# Allegro board LAUNCHXL-CC1310.brd
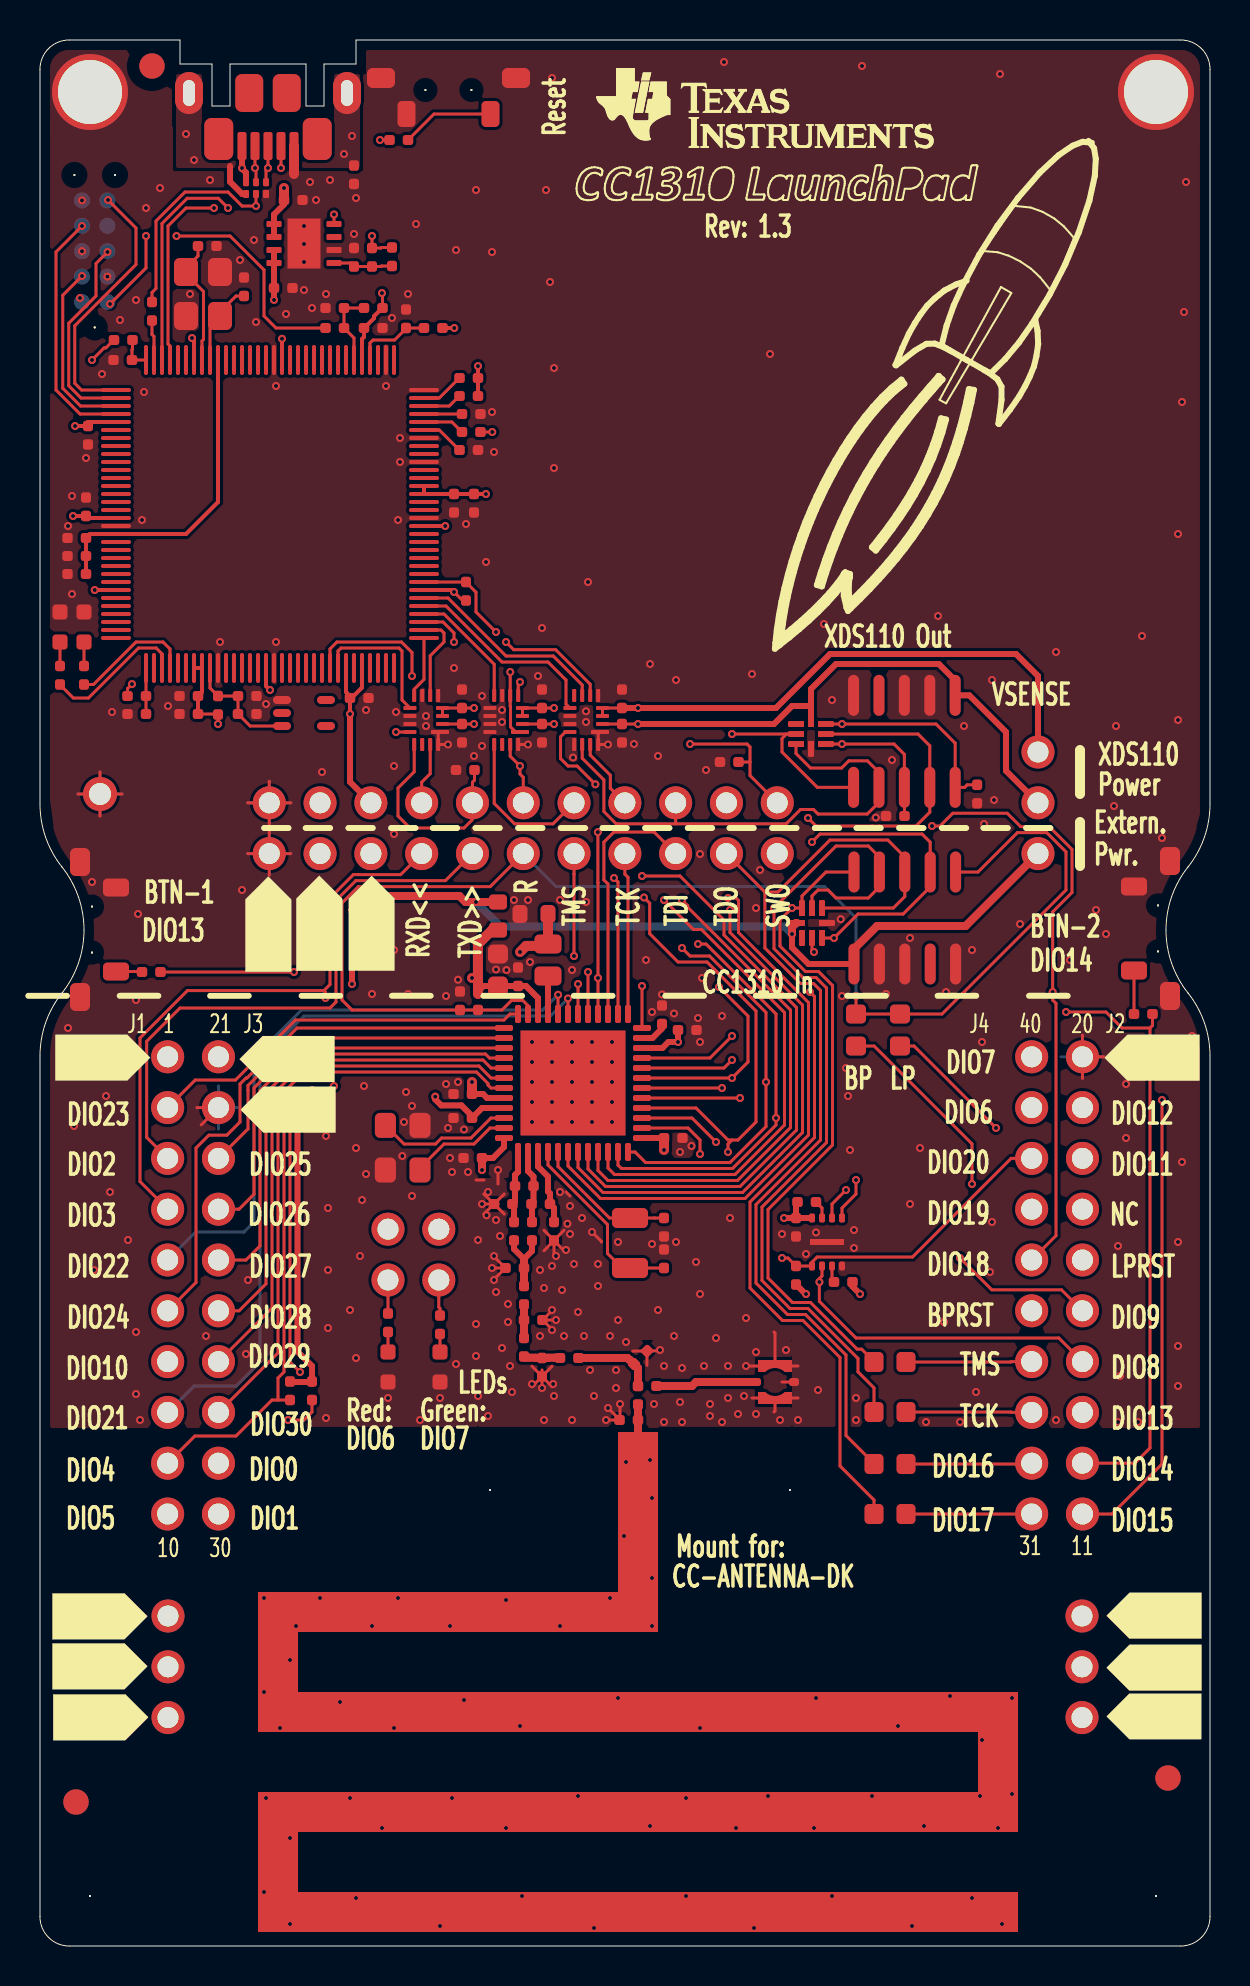
[diagram p0: board, top side]
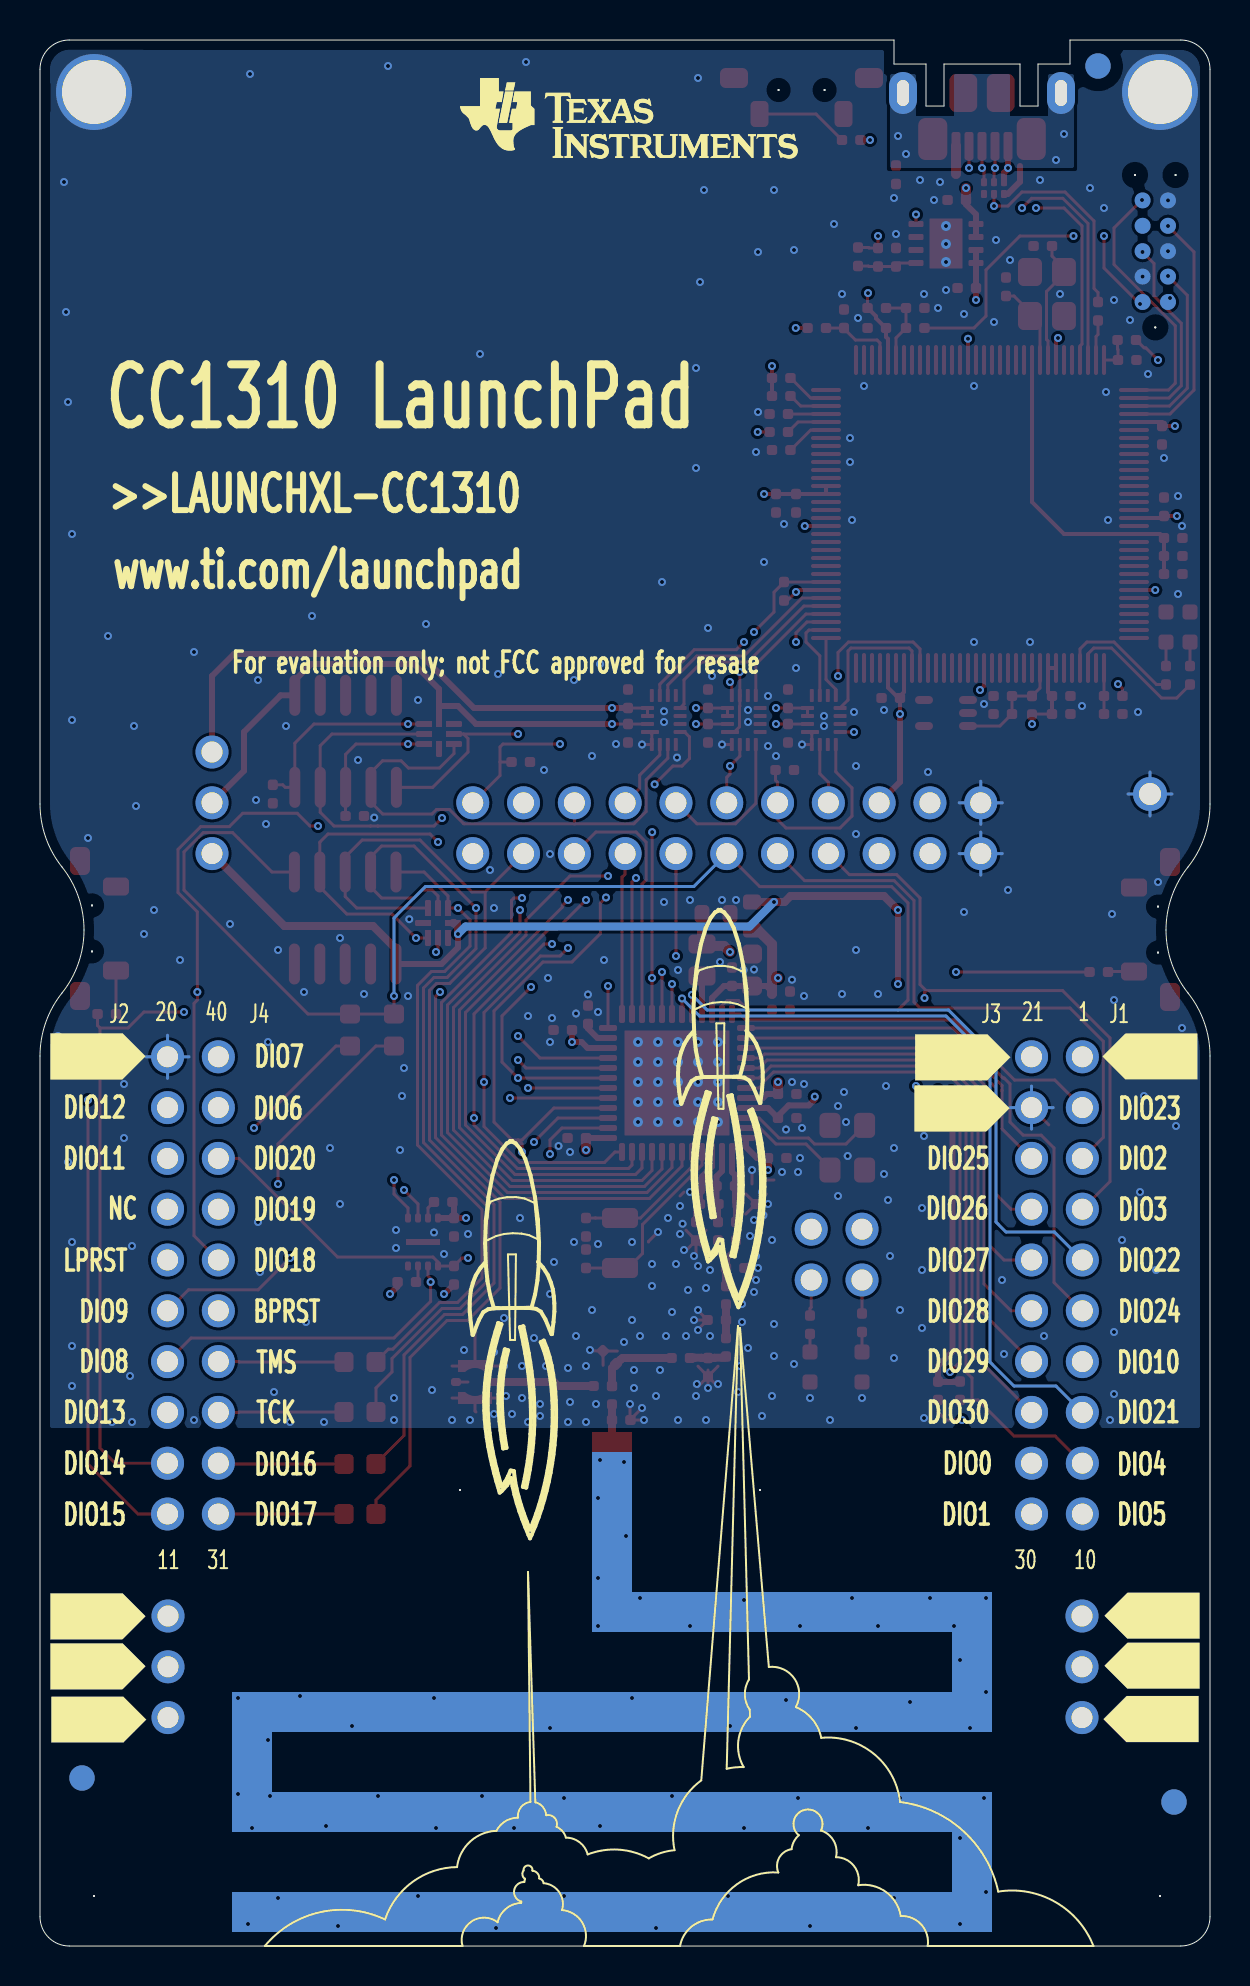
[diagram p1: board, bottom side, seen from below]

Outline 58.5 x 95.3 mm; copper layers: TOP, L2, L3, BOTTOM. Coordinates in mm from the lower left corner of the outline.
Outline path: 0,93.84 0,57.1 arc(0.28,55.43) 1.1,53.95 arc(1.92,52.47) 2.2,50.8 arc(1.92,49.13) 1.1,47.65 arc(0.28,46.17) 0,44.5 0,1.46 arc(0.43,0.43) 1.46,0 57.04,0 arc(58.07,0.43) 58.5,1.46 58.5,44.5 arc(58.22,46.17) 57.4,47.65 arc(56.58,49.13) 56.3,50.8 arc(56.58,52.47) 57.4,53.95 arc(58.22,55.43) 58.5,57.1 58.5,93.84 arc(58.07,94.87) 57.04,95.3 15.8,95.3 15.8,94.1 14.2,94.1 14.2,92 13.3,92 13.3,94.1 9.5,94.1 9.5,92 8.6,92 8.6,94.1 7,94.1 7,95.3 1.46,95.3 arc(0.43,94.87) 0,93.84

## Placement (name value [footprint] x y rotation side)
A1  868MHz/2440MHz  [ANTENNA_DN024N]  29.9 25.2 180 top
C3  100nF  [CAPC1005X60B2N]  31.2 40.4 0 top
C4  100nF  [CAPC1005X60B2N]  31.9 45.8 0 top
C5  100nF  [CAPC1005X60B2N]  21.6 42.6 180 top
C6  22uF  [CAPC1608X100A2N]  22.9 48 90 top
C7  100nF  [CAPC1005X60B2N]  23.9 48 90 top
C8  22uF  [CAPC1608X100A2L]  25.4 51.6 180 top
C9  100nF  [CAPC1005X60B2N]  22.1 39.4 180 top
C11  3.6pF  [CAPC1005X60B2N]  22.7 37.1 0 top
C12  2.7pF  [CAPC1005X60B2N]  24.2 33.9 180 top
C13  6.2pF  [CAPC1005X60B2N]  24.2 31.3 0 top
C14  3pF  [CAPC1005X60B2N]  25.1 29.4 270 top
C15  100pF  [CAPC1005X60B2N]  26 29.4 0 top
C16  100nF  [CAPC1005X60B2N]  21.6 41.4 180 top
C17  12pF  [CAPC1005X60B2N]  31.2 33.9 90 top
C18  12pF  [CAPC1005X60B2N]  31.2 36.4 270 top
C19  1uF  [CAPC1005X60B2N]  31.1 46.1 90 top
C20  100nF  [CAPC1005X60B2N]  21 46.8 90 top
C21  100pF  [CAPC1005X60B2N]  25.7 36.2 270 top
C22  3.6pF  [CAPC1005X60B2N]  24.6 36.2 270 top
C24  DNM  [CAPC1005X60B2N]  29.7 29.1 45 top
C30  100nF  [CAPC1005X60B2N]  37.8 36.4 270 top
C32  100nF  [CAPC1005X60B2N]  9.9 62.5 0 top
C33  12pF  [CAPC1005X60B2N]  10.2 82.5 90 top
C34  12pF  [CAPC1005X60B2N]  7.9 85 0 top
C35  10nF  [CAPC1005X60B2N]  15.5 62.4 0 top
C36  10nF  [CAPC1005X60B2N]  2.3 71.5 90 top
C37  10nF  [CAPC1005X60B2N]  2.4 76 270 top
C38  100nF  [CAPC1005X60B2N]  16.2 80.9 0 top
C39  100nF  [CAPC1005X60B2N]  20.7 72.6 270 top
C40  1uF  [CAPC1005X60B2N]  21.7 72.6 270 top
C41  10nF  [CAPC1005X60B2N]  7.9 62.5 180 top
C42  1uF  [CAPC1005X60B2N]  7.9 61.6 180 top
C43  100nF  [CAPC1005X60B2N]  2.3 70.4 180 top
C44  1uF  [CAPC1005X60B2N]  2.3 69.5 180 top
C45  2.2uF  [CAPC1005X60B2N]  2.3 68.6 180 top
C46  100nF  [CAPC1005X60B2N]  18.3 80.9 90 top
C47  15pF  [CAPC1005X60B2N]  16.6 84.9 270 top
C48  2.2uF  [CAPC1005X60B2N]  12.2 87.3 0 top
C49  2.2uF  [CAPC1005X60B2N]  11.7 82.9 0 top
C50  10nF  [CAPC1005X60B2N]  9.9 61.6 0 top
C52  100nF  [CAPC1005X60B2N]  21.1 61.9 90 top
C53  100nF  [CAPC1005X60B2N]  21.1 61.1 270 top
C54  100nF  [CAPC1005X60B2N]  25.1 61.9 90 top
C55  100nF  [CAPC1005X60B2N]  25.1 61.1 270 top
C56  100nF  [CAPC1005X60B2N]  29.1 61.9 90 top
C57  100nF  [CAPC1005X60B2N]  29.1 61.1 270 top
C58  DNM_0402  [CAPC1005X60B2N]  29.9 26.3 180 top
C59  100nF  [CAPC1005X60B2N]  4.6 79.3 180 top
CR1  LPL296-J2L2-25  [LEDC1707X65L]  20 28.2 90 top
CR2  LS L296-P2Q2-1  [LEDC1708X67L]  17.4 28.2 90 top
CR4  LS L296-P2Q2-1  [LEDC1708X67L]  1 66.7 270 top
CR5  LPL296-J2L2-25  [LEDC1707X65L]  2.2 66.7 270 top
CR6  TPD4E004DRY  [SON50P100X145X60-6N]  10.3 87.6 0 top
CR7  TPD6E004RSER  [QFN50P150X150X60-8N]  37.8 61.1 270 top
CR8  TPD6E004RSER  [QFN50P150X150X60-8N]  38.1 50.4 0 top
FIDU1  FIDU_1.27mm  [FID127X142]  5.6 94 0 top
FIDU2  FIDU_1.27mm  [FID127X142]  1.8 7.2 0 top
FIDU3  FIDU_1.27mm  [FID127X142]  56.4 8.4 0 top
FIDU4  FIDU_1.27mm  [FID127X142]  5.6 94 180 bottom
FIDU5  FIDU_1.27mm  [FID127X142]  1.8 7.2 180 bottom
FIDU6  FIDU_1.27mm  [FID127X142]  56.4 8.4 180 bottom
FL1  BLM18HE152SN1  [FIL_BLM18HE152SN1DL]  22.9 50.8 90 top
J1  SSQ-110-23-L-D  [SAMTEC_SSQ11023LD_A2B]  6.38 44.46 0 bottom
J2  SSQ-110-23-L-D  [SAMTEC_SSQ11023LD_A2B]  49.58 44.46 0 bottom
J6  105164-0001  [MOLEX_1051640001_A2N]  10.1 90 0 top
L1  6.8uH  [INDC2012X150L]  25.4 48.5 90 top
L12  7.5nH  [INDC1005X60B2N]  23.7 36.2 270 top
L13  6.8nH  [INDC1005X60B2N]  24.2 33 270 top
L14  6.8nH  [INDC1005X60B2N]  24.2 30.4 270 top
L22  27nH  [INDC1005X60B2N]  23.75 38 0 top
L23  7.5nH  [INDC1005X60B2N]  25.5 37.1 180 top
MH1  HOLE_3.2mm_NPL  [MTG320]  2.5 2.5 0 top
MH2  HOLE_3.2mm_NPL  [MTG320]  55.8 2.5 0 top
MH3  HOLE_3.2mm_PTH  [MTG320_380]  2.5 92.7 0 top
MH4  HOLE_3.2mm_PTH  [MTG320_380]  55.8 92.7 0 top
MH5  HOLE_1.1mm_PTH  [MTG110_170]  3 57.6 0 top
NOREF  #VALUE  [unnamed]  22.5 22.8 0 top
NOREF#2  -  [#2]  -1.8 8.9 0 top
NOREF#3  -  [#2]  16.5 46.3 90 top
NOREF#4  -  [#2]  40.01 0 90 top
NOREF#5  -  [#2]  53.1 10.1 0 top
NOREF#6  -  [#2]  0.7 43.2 0 top
NOREF#7  -  [#2]  51.6 14.1 0 top
NOREF#8  -  [#2]  13.8 46.4 90 top
NOREF#9  -  [#2]  8.3 39.4 0 top
NOREF#10  -  [#2]  51.5 42 0 top
NOREF#11  -  [#2]  17.8 48.7 90 top
NOREF#12  -  [#2]  -1.7 11.6 0 top
NOREF#13  -  [#2]  0 79.15 0 top
NOREF#14  -  [#2]  -1.7 14.1 0 top
NOREF#15  -  [#2]  51.6 11.5 0 top
NOREF#16  -  [#2]  8.3 41.8 0 top
NOREF#17  -  [#2]  60.3 42.1 180 bottom
NOREF#18  -  [#2]  17.2 41.9 180 bottom
NOREF#19  -  [#2]  7 8.8 180 bottom
NOREF#20  -  [#2]  17.1 39.5 180 bottom
NOREF#21  -  [#2]  58 10.1 180 bottom
NOREF#22  -  [#2]  60.3 11.6 180 bottom
NOREF#23  -  [#2]  7 11.6 180 bottom
NOREF#24  -  [#2]  51.53 65.52 180 bottom
NOREF#25  -  [#2]  5.6 43.1 180 bottom
NOREF#26  -  [#2]  60.3 14.1 180 bottom
NOREF#27  -  [#2]  7 14.1 180 bottom
P1  BB02-HC031-KB1-603000  [GRADCONN_BB02HC031KB1603000_A2B]  52.1 11.42 90 top
P2  BB02-HC031-KB1-603000  [GRADCONN_BB02HC031KB1603000_A2B]  6.4 11.42 90 top
P4  BB02-HJ221-KB1-603000  [GRADCONN_BB02HJ221KB160300_A2B]  36.86 57.16 180 top
P5  FTSH-105-01-F-DV-K  [SAMTEC_FTSH-105-01-F-DV-K-10L]  40.7 49.1 0 top
P6  BB02-HJ041-KB1-603000  [GRADCONN_BB02HJ041KB1603000_A2B]  17.4 33.3 0 top
P7  FTSH-105-01-F-DV-K  [SAMTEC_FTSH-105-01-F-DV-K-10L]  45.76 62.53 180 top
P8  TC2050-IDC-NL  [TAGCONNECT_TC2050IDCNLN]  2.1 82.2 90 bottom
P10  BB02-HC031-KB1-603000  [GRADCONN_BB02HC031KB1603000_A2B]  49.9 59.7 270 top
P11  MM5829-2700  [MURATA_MM58292700RJ4_A2N]  35.8 28.2 0 top
R1  100k  [RESC1005X40B2N]  21.9 46.8 90 top
R2  3.3k  [RESC1005X40B2N]  12.5 27.3 90 top
R3  3.3k  [RESC1005X40B2N]  13.6 27.3 90 top
R11  2.2k  [RESC1005X40B2N]  37.8 34 270 top
R12  1.8pF  [CAPC1005X60B2N]  29.9 28 270 top
R13  0  [RESC1005X40B2N]  29.9 28 0 top
R14  220  [RESC1005X40B2N]  17.4 30.7 90 top
R15  180  [RESC1005X40B2N]  20 30.6 90 top
R17  10k  [RESC1005X40B2N]  16.2 81.9 0 top
R18  4.7k  [RESC1005X40B2N]  8.9 62.5 270 top
R19  DNM  [RESC1005X40B2N]  5.6 82.2 270 top
R20  100  [RESC1005X40B2N]  15.2 80.9 180 top
R21  DNM  [RESC1005X40B2N]  15.2 81.9 180 top
R22  330k  [RESC1005X40B2N]  5.3 62.5 180 top
R23  180  [RESC1005X40B2N]  1 64 270 top
R24  220k  [RESC1005X40B2N]  5.3 61.6 180 top
R25  220  [RESC1005X40B2N]  2.2 64 270 top
R27  1k  [RESC1005X40B2N]  21.9 77.5 180 top
R28  4.87k  [RESC1005X40B2N]  21.9 74.8 180 top
R29  1k  [RESC1005X40B2N]  21.1 76.6 0 top
R30  1k  [RESC1005X40B2N]  21.1 75.7 0 top
R31  51  [RESC1005X40B2N]  19.2 80.9 0 top
R32  33k  [RESC1005X40B2N]  15.7 88.1 90 top
R33  51k  [RESC1005X40B2N]  17.6 84 90 top
R34  30k  [RESC1005X40B2N]  15.7 84.9 270 top
R39  1k  [RESC1005X40B2N]  21.9 78.4 180 top
R46  DNM  [RESC1608X55N]  43.3 29.2 180 top
R47  DNM  [RESC1608X55N]  43.3 26.7 180 top
R48  DNM  [RESC1608X55N]  43.3 24.1 180 top
R49  DNM  [RESC1608X55N]  43.3 21.6 180 top
R51  DNM  [RESC1608X55N]  40.8 45 90 top
R52  0  [RESC1608X55N]  43 46.6 270 top
R55  100  [RESC1005X40B2N]  54.7 46.6 0 top
R56  100  [RESC1005X40B2N]  5.1 48.7 0 top
R57  100  [RESC1005X40B2N]  18.4 90.3 180 top
R58  3.3k  [RESC1005X40B2N]  21.3 68.2 270 top
R59  DNM  [RESC1005X40B2N]  39.7 33.2 0 top
R60  DNM  [RESC1005X40B2N]  38.8 37.2 180 top
R61  100k  [RESC1005X40B2N]  20.8 58.8 0 top
R62  100k  [RESC1005X40B2N]  34 59.2 0 top
R63  100k  [RESC1005X40B2N]  42.3 56.5 0 top
R65  100k  [RESC1005X40B2N]  46.86 57.14 90 top
R66  100  [RESC1005X40B2N]  3.7 80.3 0 top
SW1  1188E-1K2-V  [SW_1188E1K2V_A2N]  2 54.2 270 top
SW2  1188E-1K2-V  [SW_1188E1K2V_A2N]  56.5 47.5 90 top
SW3  1188E-1K2-V  [SW_1188E1K2V_A2N]  23.8 93.4 180 top
U1  CC1310F128RGZT  [QFNFC50P700X700X100-49A2N]  23.9 39.7 0 top
U4  MX25R8035FZUIL0  [SON50P300X200X60-9B2L]  38.6 34 0 top
U5  TM4C1294NCPDTT3R  [QFP40P1600X1600X120-128N]  5.3 63.9 0 top
U6  LM4040B25IDCK  [SOT65P210X110-5N]  12.1 62.3 270 top
U7  TPS79601DR  [SON65P300X300X100-9AL]  11.7 86.1 270 top
U8  SN74AVC4T245RSV  [QFNFC40P180X260X55-16A2L]  20 60.7 90 top
U9  SN74AVC4T245RSV  [QFNFC40P180X260X55-16A2L]  28 60.7 90 top
U10  SN74AVC4T245RSV  [QFNFC40P180X260X55-16A2L]  24 60.7 90 top
UNK#REFDES  -  [#2]  28.8 93.9 0 top
UNK#REFDES#2  -  [#2]  36.5 93.4 180 bottom
Y1  32.768kHz  [XTAL_FC-135N]  29.5 33.9 90 top
Y2  24MHz  [OSCCC250X320X60-4L]  19 38.8 90 top
Y3  16MHz  [OSCCC250X320X100-4BN]  9 81.5 90 top

## Library data of the parts
A1 = ANTENNA_PCB: User Part Number: #PN
C3-C5 C7 C9 C11-C22 C24 C30 C32-C50 C52-C59 = CAPACITOR: User Part Number: #PN
C6 C8 = CAPACITOR: User Part Number: #PN; alternate symbols: (CAPC1608X100A2L,CAPC1608X100A2M)
CR1 CR5 = LED: alternate symbols: (LEDC1707X65L,LEDC1707X65M)
CR2 CR4 = LED: alternate symbols: (LEDC1708X67L,LEDC1708X67M)
CR6 = DIODE_TPD4E004_SON6: User Part Number: #PN; alternate symbols: (SON50P100X145X65-6L,SON50P100X145X65-6M)
CR7 CR8 = DIODE_TVS_TPD6E004_QFN8_V1_0: alternate symbols: (QFN50P150X150X60-8L,QFN50P150X150X60-8M,QFN50P150X150X60-8AL)
FIDU1-FIDU6 = FIDMARK
FL1 = FILTER_2PIN: alternate symbols: (FIL_BLM18HE152SN1DL,FIL_BLM18HE152SN1DM)
J1 J2 = CONN_HEADER_2X10_J_S_V1: User Part Number: #PN; alternate symbols: (SAMTEC_SSQ11023LD_A2C,SAMTEC_SSQ11023LD_A2A)
J6 = CONN_USB_MICRO_B_2MH: User Part Number: #PN; alternate symbols: (MOLEX_1051640001_A2L,MOLEX_1051640001_A2M)
L1 = INDUCTOR: alternate symbols: (INDC2012X150L,INDC2012X150M)
L12-L14 L22 L23 = INDUCTOR: User Part Number: #PN
MH1 MH2 = HOLE_NPL
MH3-MH5 = HOLE_PTH
NOREF = -: User Part Number: #PN
P1 P2 P10 = CONN_HEADER_3_P_S: User Part Number: #PN; alternate symbols: (GRADCONN_BB02HC031KB1603000_A2C,GRADCONN_BB02HC031KB1603000_A2A)
P4 = CONN_HEADER_2X11_P_S: User Part Number: #PN; alternate symbols: (GRADCONN_BB02HJ221KB160300_A2C,GRADCONN_BB02HJ221KB160300_A2A)
P5 P7 = CONN_HEADER_2X5: alternate symbols: (SAMTEC_FTSH-105-01-F-DV-K-10L,SAMTEC_FTSH-105-01-F-DV-K-10M)
P6 = CONN_HEADER_2X2_P: User Part Number: #PN; alternate symbols: (GRADCONN_BB02HJ041KB1603000_A2C,GRADCONN_BB02HJ041KB1603000_A2A)
P8 = CONN_IDC_TC2050-IDC-NL: User Part Number: #PN; alternate symbols: (TAGCONNECT_TC2050IDCNLL,TAGCONNECT_TC2050IDCNLM)
P11 = CONN_COAX_1_1_P_2MH: User Part Number: #PN; alternate symbols: (MURATA_MM58292700RJ4_A2L,MURATA_MM58292700RJ4_A2M)
R1-R3 R11 R13-R15 R17-R25 R27-R34 R39 R55-R63 R65 R66 = RESISTOR: User Part Number: #PN
R12 = CAPACITOR: User Part Number: #PN; alternate symbols: (CAPC1005X60B2L,CAPC1005X60B2M)
R46-R49 R51 R52 = RESISTOR: alternate symbols: (RESC1608X55L,RESC1608X55M)
SW1-SW3 = SWITCH_TACT_V2: alternate symbols: (SW_1188E1K2V_A2L,SW_1188E1K2V_A2M)
U1 = IC_RF_CC1310F128RGZT_VQFN48: User Part Number: #PN; alternate symbols: (QFNFC50P700X700X100-49A2L,QFNFC50P700X700X100-49A2M)
U4 = IC_FLASH_MX25R8035F_USON8: User Part Number: #PN; alternate symbols: (SON50P300X200X60-9B2L,SON50P300X200X60-9B2M)
U5 = IC_PROC_TM4C1294NCPDT_TQFP128: alternate symbols: (QFP40P1600X1600X120-128L,QFP40P1600X1600X120-128M)
U6 = IC_REF_LM4040_SC70-5: alternate symbols: (SOT65P210X110-5L,SOT65P210X110-5M)
U7 = IC_PM_TPS79601_SON8: alternate symbols: (SON65P300X300X100-9AL,SON65P300X300X100-9AM)
U8-U10 = IC_XCVR_SN74AVC4T245_UQFN16_2: User Part Number: #PN; alternate symbols: (QFNFC40P180X260X55-16A2L,QFNFC40P180X260X55-16A2M)
Y1 = CRYSTAL: alternate symbols: (XTAL_FC-135L,XTAL_FC-135M)
Y2 = XTAL_4PIN_S: alternate symbols: (OSCCC250X320X60-4L,OSCCC250X320X60-4M)
Y3 = XTAL_4: alternate symbols: (OSCCC250X320X100-4BL,OSCCC250X320X100-4BM)

## Footprints (pads in the part's own frame, mm; a bottom-side part is the same pattern mirrored in y, then rotated)
ANTENNA_DN024N
  rect 2x1 smd: 1(0,0)
CAPC1005X60B2N
  custom 0.524x0.5 smd: 1(0,0) 2(0.924,0)
CAPC1608X100A2L
  custom 0.75x0.9 smd: 1(0,0) 2(1.4,0)
CAPC1608X100A2N
  custom 0.95x1 smd: 1(0,0) 2(1.6,0)
FID127X142
  round 1.27 smd: 1(0,0)
FIL_BLM18HE152SN1DL
  custom 0.752x0.9 smd: 1(0,0) 2(1.4,0)
GRADCONN_BB02HC031KB1603000_A2B
  round 1.65 hole 1.05: 1(0,0) 2(2.54,0) 3(5.08,0)
GRADCONN_BB02HJ041KB1603000_A2B
  round 1.65 hole 1.05: 1(0,0) 2(0,2.54) 3(2.54,0) 4(2.54,2.54)
GRADCONN_BB02HJ221KB160300_A2B
  round 1.65 hole 1.05: 1(0,0) 2(0,2.54) 3(2.54,0) 4(2.54,2.54) 5(5.08,0) 6(5.08,2.54) 7(7.62,0) 8(7.62,2.54) 9(10.16,0) 10(10.16,2.54) 11(12.7,0) 12(12.7,2.54) 13(15.24,0) 14(15.24,2.54) 15(17.78,0) 16(17.78,2.54) 17(20.32,0) 18(20.32,2.54) 19(22.86,0) 20(22.86,2.54) 21(25.4,0) 22(25.4,2.54)
INDC1005X60B2N
  custom 0.524x0.5 smd: 1(0,0) 2(0.924,0)
INDC2012X150L
  custom 0.95x1.352 smd: 1(0,0) 2(1.6,0)
LEDC1707X65L
  custom 0.752x0.752 smd: 1(0,0) 2(1.501,0)
LEDC1708X67L
  custom 0.752x0.752 smd: 1(0,0) 2(1.501,0)
MOLEX_1051640001_A2N
  custom 1.45x2.1 smd: (-1.162,0.35) (3.762,0.35)
  custom 1.4x1.9 smd: (0.362,2.65) (2.238,2.65)
  custom 0.45x1.4 smd: 1(0,0) 2(0.65,0) 3(1.3,0) 4(1.95,0) 5(2.6,0)
  oval 1.4x2.1 hole 0.6x1.3: M1(-2.65,2.65) M2(5.25,2.65)
MTG110_170
  round 1.699 hole 1.1: 1(0,0)
MTG320
  round 0.099 hole 3.2 unplated: (0,0)
MTG320_380
  round 3.8 hole 3.2: 1(0,0)
MURATA_MM58292700RJ4_A2N
  custom 0.5x0.4 smd: 1(0,0) 2(1.9,0)
  custom 1.7x0.6 smd: M1(0.95,-0.8) M2(0.95,0.8)
OSCCC250X320X60-4L
  custom 1.25x1.052 smd: 1(0,0) 2(2.23,0) 3(2.23,1.73) 4(0,1.73)
OSCCC250X320X100-4BN
  custom 1.402x1.198 smd: 1(0,0) 2(2.2,0) 3(2.2,1.699) 4(0,1.699)
QFN50P150X150X60-8N
  custom 0.3x0.8 smd: 1(0,0) 2(0.5,0) 3(1,0) 5(1,1.5) 6(0.5,1.5) 7(0,1.5)
  custom 0.8x0.3 smd: 4(1.25,0.75) 8(-0.25,0.75)
QFNFC40P180X260X55-16A2L
  custom 0.2x0.9 smd: 1(0,0)
  custom 0.2x0.65 smd: 2(0.4,-0.125) 3(0.8,-0.125) 4(1.2,-0.125) 9(1.2,1.505) 10(0.8,1.505) 11(0.4,1.505) 12(0,1.505)
  custom 0.65x0.2 smd: 5(1.825,0.09) 6(1.825,0.49) 7(1.825,0.89) 8(1.825,1.29) 13(-0.625,1.29) 14(-0.625,0.89) 15(-0.625,0.49) 16(-0.625,0.09)
QFNFC50P700X700X100-49A2N
  custom 0.3x0.9 smd: 1(0,0) 2(0.5,0) 3(1,0) 4(1.5,0) 5(2,0) 6(2.5,0) 7(3,0) 8(3.5,0) 9(4,0) 10(4.5,0) 11(5,0) 12(5.5,0) 25(5.5,6.9) 26(5,6.9) 27(4.5,6.9) 28(4,6.9) 29(3.5,6.9) 30(3,6.9) 31(2.5,6.9) 32(2,6.9) 33(1.5,6.9) 34(1,6.9) 35(0.5,6.9) 36(0,6.9)
  custom 0.9x0.3 smd: 13(6.2,0.7) 14(6.2,1.2) 15(6.2,1.7) 16(6.2,2.2) 17(6.2,2.7) 18(6.2,3.2) 19(6.2,3.7) 20(6.2,4.2) 21(6.2,4.7) 22(6.2,5.2) 23(6.2,5.7) 24(6.2,6.2) 37(-0.7,6.2) 38(-0.7,5.7) 39(-0.7,5.2) 40(-0.7,4.7) 41(-0.7,4.2) 42(-0.7,3.7) 43(-0.7,3.2) 44(-0.7,2.7) 45(-0.7,2.2) 46(-0.7,1.7) 47(-0.7,1.2) 48(-0.7,0.7)
  rect 5.25x5.25 smd: 49(2.75,3.45)
QFP40P1600X1600X120-128N
  oval 0.201x1.501 smd: 1(0,0) 2(0.399,0) 3(0.8,0) 4(1.199,0) 5(1.6,0) 6(1.999,0) 7(2.4,0) 8(2.799,0) 9(3.2,0) 10(3.599,0) 11(4,0) 12(4.399,0) 13(4.801,0) 14(5.199,0) 15(5.601,0) 16(6,0) 17(6.401,0) 18(6.8,0) 19(7.201,0) 20(7.6,0) 21(8.001,0) 22(8.4,0) 23(8.801,0) 24(9.2,0) 25(9.601,0) 26(10,0) 27(10.399,0) 28(10.8,0) 29(11.199,0) 30(11.6,0) 31(11.999,0) 32(12.4,0) 65(12.4,15.4) 66(11.999,15.4) 67(11.6,15.4) 68(11.199,15.4) 69(10.8,15.4) 70(10.399,15.4) 71(10,15.4) 72(9.601,15.4) 73(9.2,15.4) 74(8.801,15.4) 75(8.4,15.4) 76(8.001,15.4) 77(7.6,15.4) 78(7.201,15.4) 79(6.8,15.4) 80(6.401,15.4) 81(6,15.4) 82(5.601,15.4) 83(5.199,15.4) 84(4.801,15.4) 85(4.399,15.4) 86(4,15.4) 87(3.599,15.4) 88(3.2,15.4) 89(2.799,15.4) 90(2.4,15.4) 91(1.999,15.4) 92(1.6,15.4) 93(1.199,15.4) 94(0.8,15.4) 95(0.399,15.4) 96(0,15.4)
  oval 1.501x0.201 smd: 33(13.899,1.501) 34(13.899,1.9) 35(13.899,2.301) 36(13.899,2.7) 37(13.899,3.099) 38(13.899,3.5) 39(13.899,3.899) 40(13.899,4.3) 41(13.899,4.699) 42(13.899,5.1) 43(13.899,5.499) 44(13.899,5.9) 45(13.899,6.299) 46(13.899,6.7) 47(13.899,7.099) 48(13.899,7.501) 49(13.899,7.899) 50(13.899,8.301) 51(13.899,8.7) 52(13.899,9.101) 53(13.899,9.5) 54(13.899,9.901) 55(13.899,10.3) 56(13.899,10.701) 57(13.899,11.1) 58(13.899,11.501) 59(13.899,11.9) 60(13.899,12.301) 61(13.899,12.7) 62(13.899,13.099) 63(13.899,13.5) 64(13.899,13.899) 97(-1.501,13.899) 98(-1.501,13.5) 99(-1.501,13.099) 100(-1.501,12.7) 101(-1.501,12.301) 102(-1.501,11.9) 103(-1.501,11.501) 104(-1.501,11.1) 105(-1.501,10.701) 106(-1.501,10.3) 107(-1.501,9.901) 108(-1.501,9.5) 109(-1.501,9.101) 110(-1.501,8.7) 111(-1.501,8.301) 112(-1.501,7.899) 113(-1.501,7.501) 114(-1.501,7.099) 115(-1.501,6.7) 116(-1.501,6.299) 117(-1.501,5.9) 118(-1.501,5.499) 119(-1.501,5.1) 120(-1.501,4.699) 121(-1.501,4.3) 122(-1.501,3.899) 123(-1.501,3.5) 124(-1.501,3.099) 125(-1.501,2.7) 126(-1.501,2.301) 127(-1.501,1.9) 128(-1.501,1.501)
RESC1005X40B2N
  custom 0.524x0.5 smd: 1(0,0) 2(0.924,0)
RESC1608X55N
  custom 0.95x1 smd: 1(0,0) 2(1.6,0)
SAMTEC_FTSH-105-01-F-DV-K-10L
  oval 0.551x2.05 smd: 1(0,0) 2(0,4.6) 3(1.27,0) 4(1.27,4.6) 5(2.54,0) 6(2.54,4.6) 7(3.81,0) 8(3.81,4.6) 9(5.08,0) 10(5.08,4.6)
SAMTEC_SSQ11023LD_A2B
  round 1.65 hole 1.05: 1(0,0) 2(2.54,0) 3(0,2.54) 4(2.54,2.54) 5(0,5.08) 6(2.54,5.08) 7(0,7.62) 8(2.54,7.62) 9(0,10.16) 10(2.54,10.16) 11(0,12.7) 12(2.54,12.7) 13(0,15.24) 14(2.54,15.24) 15(0,17.78) 16(2.54,17.78) 17(0,20.32) 18(2.54,20.32) 19(0,22.86) 20(2.54,22.86)
SON50P100X145X60-6N
  custom 0.3x0.402 smd: 1(0,0) 2(0.5,0) 3(1.001,0) 4(1.001,0.589) 5(0.5,0.589) 6(0,0.589)
SON50P300X200X60-9B2L
  custom 0.3x0.45 smd: 1(0,0) 2(0.5,0) 3(1,0) 4(1.5,0) 5(1.5,2.4) 6(1,2.4) 7(0.5,2.4) 8(0,2.4)
  rect 1.7x0.3 smd: 9(0.75,1.2)
SON65P300X300X100-9AL
  custom 0.3x0.75 smd: 1(0,0) 2(0.65,0) 3(1.3,0) 4(1.95,0) 5(1.95,3) 6(1.3,3) 7(0.65,3) 8(0,3)
  rect 2.5x1.65 smd: 9(0.975,1.5)
SOT65P210X110-5N
  oval 0.399x0.899 smd: 1(0,0) 2(0.65,0) 3(1.3,0) 4(1.3,2.2) 5(0,2.2)
SW_1188E1K2V_A2N
  round 0.099 hole 0.899 unplated: (2.229,0.6) (4.529,0.6)
  custom 1.4x1 smd: 1(0,0) 2(6.75,0)
  custom 0.9x1.3 smd: 3(1.275,1.8) 4(5.475,1.8)
TAGCONNECT_TC2050IDCNLN
  round 0.099 hole 1.001 unplated: (-1.27,0.635) (6.35,-0.38) (6.35,1.65)
  round 0.8 smd: 1(0,0) 2(1.27,0) 3(2.54,0) 4(3.81,0) 5(5.08,0) 6(5.08,1.27) 7(3.81,1.27) 8(2.54,1.27) 9(1.27,1.27) 10(0,1.27)
unnamed
  round 0.099 hole 3.2 unplated: (0,0) (15,0)
XTAL_FC-135N
  custom 1x1.798 smd: 1(0,0) 2(2.499,0)

## Nets
+5V: J1.2 P2.1 P4.20
GND: C3.2 C4.2 C5.2 C6.2 C7.2 C8.2 C9.2 C11.1 C12.2 C13.2 C14.2 C16.2 C17.2 C18.2 C19.2 C20.2 C21.2 C24.2 C30.2 C32.2 C33.2 C34.2 C35.2 C36.2 C37.2 C38.2 C39.2 C40.2 C41.2 C42.2 C43.2 C44.2 C45.2 C46.2 C48.2 C49.2 C50.2 C52.2 C53.2 C54.2 C55.2 C56.2 C57.2 C58.2 C59.2 CR1.1(C) CR2.1(C) CR4.1(C) CR5.1(C) CR6.3 CR7.4(GND) CR8.4(GND) J1.4 J2.2 J6.5(GND) MH3.1 MH4.1 MH5.1 P1.2 P1.3 P2.2 P2.3 P4.21 P4.22 P5.3 P5.5 P5.9 P7.3 P7.5 P7.9 P8.3(7) P8.5(8) P8.9(10) P11.2 P11.M1 P11.M2 R21.2 R24.2 R28.1 R29.2 R32.1 R34.1 R61.1 R62.1 R63.1 R65.1 SW1.1 SW1.2 SW1.3 SW2.1 SW2.2 SW2.4 SW3.1 SW3.2 SW3.4 U1.49(EGP/GND) U4.4(GND) U4.9(EGP) U5.10(GNDA) U5.17(GND#17) U5.48(GND#48) U5.55(GND#55) U5.58(GND#58) U5.64(NWAKE) U5.66(XOSC0) U5.80(GND#80) U5.114(GND#114) U6.1(ANODE) U7.6(GND) U7.9(GND/TAB) U8.1(1NOE) U8.5(2DIR) U8.7(1A2) U8.10(GND#10) U8.11(GND#11) U8.16(2NOE) U9.1(1NOE) U9.5(2DIR) U9.10(GND#10) U9.11(GND#11) U9.13(2B1) U9.16(2NOE) U10.7(1A2) U10.9(2A2) U10.10(GND#10) U10.11(GND#11) U10.12(2B2) U10.16(2NOE) Y2.2 Y2.4 Y3.2(GND) Y3.4(NC_4)
VDDC: C43.1 C44.1 C45.1 U5.87(VDDC#87) U5.115(VDDC#115)
VDDR: C8.1 C9.1 C16.1 L1.2 U1.45(VDDR) U1.48(VDDR_RF)
VDDS: C3.1 C4.1 C5.1 C6.1 C7.1 FL1.1 R1.2 U1.13(VDDS2) U1.22(VDDS3) U1.34(VDDS_DCDC) U1.44(VDDS)
BP_RESET: J2.11 R52.2
CC1310_RESET: C20.1 CR8.2(IO2) P4.12 P5.10 R1.1 R51.2 R52.1 U1.35(RESET_N)
CC1310_RXD: J1.7 P4.16 U1.7(DIO_2)
CC1310_SWO: J2.9 P4.2 U1.28(DIO_18)
CC1310_TCK: CR8.6(IO5) P4.8 P5.4 R47.2 U1.25(JTAG_TCKC)
CC1310_TMS: CR8.7(IO6) P4.10 P5.2 R46.2 U1.24(JTAG_TMSC)
CC1310_TXD: J1.5 P4.14 U1.8(DIO_3)
CC1310_VDD: C30.1 CR8.8(VCC) FL1.2 J1.1 P1.1 P4.18 P5.1 P10.3 R2.2 R3.2 R11.2 R59.2 R60.2 U4.8(VCC)
DCDC_SW: L1.1 U1.33(DCDC_SW)
DIO1: J1.20 U1.6(DIO_1)
DIO4_SCL: J1.17 R2.1 U1.9(DIO_4)
DIO5_SDA: J1.19 R3.1 U1.10(DIO_5)
DIO6_RLED: J2.3 P6.2 U1.11(DIO_6)
DIO7_GLED: J2.1 P6.4 U1.12(DIO_7)
DIO8_MISO: J2.14 U1.14(DIO_8) U4.2(SO/SIO1)
DIO9_MOSI: J2.12 U1.15(DIO_9) U4.5(SI/SIO0)
DIO10_SCLK: J1.13 U1.16(DIO_10) U4.6(SCLK)
DIO11_CS: J2.6 U1.17(DIO_11)
DIO12: J2.4 U1.18(DIO_12)
DIO13_BTN1: J2.16 R56.2 U1.19(DIO_13)
DIO14_BTN2: J2.18 R55.2 U1.20(DIO_14)
DIO15: J2.20 U1.21(DIO_15)
DIO16_TDO: CR8.5(IO4) P4.4 P5.6 R48.2 U1.26(DIO_16)
DIO17_TDI: CR8.3(IO3) P4.6 P5.8 R49.2 U1.27(DIO_17)
DIO19_CTS: J2.7 U1.29(DIO_19)
DIO20_FLASH_CS: J2.5 R11.1 U1.30(DIO_20) U4.1(NCS)
DIO21: J1.15 U1.31(DIO_21)
DIO22: J1.9 U1.32(DIO_22)
DIO23_ANALOG: J1.3 U1.36(DIO_23)
DIO24_ANALOG: J1.11 U1.37(DIO_24)
DIO25_ANALOG: J1.6 U1.38(DIO_25)
DIO26_ANALOG: J1.8 U1.39(DIO_26)
DIO27_ANALOG: J1.10 U1.40(DIO_27)
DIO28_ANALOG: J1.12 U1.41(DIO_28)
DIO29_ANALOG: J1.14 U1.42(DIO_29)
DIO30_ANALOG: J1.16 U1.43(DIO_30)
IRSTN: P8.10(5) R20.2
ITCK: P8.4(2) U5.100(PC0/TCK/SWCLK)
ITDI: P8.8(4) U5.98(PC2/TDI)
ITDO: P8.6(3) U5.97(PC3/TDO/SWO)
ITMS: P8.2(1) U5.99(PC1/TMS/SWDIO)
LP_RESET: J2.10 R51.1
USB_DM: CR6.5 J6.2(D-) U5.93(PL7/USB0DM)
USB_DP: CR6.4 J6.3(D+) U5.94(PL6/USB0DP)
USB_ID: CR6.2 J6.4(ID) R19.1
USB_VBUS: C48.1 CR6.6 J6.1(VCC) P4.19 R22.2 R66.1 U7.1(IN#1) U7.2(IN#2) U7.8(EN)
V-SENSE: C53.1 C55.1 C57.1 CR7.8(VCC) P7.1 P10.2 U8.2(VCCB) U9.2(VCCB) U10.2(VCCB)
XDS_RESET: R58.1 U5.40(PA6) U10.1(1NOE) U10.6(1A1)
XDS_RESET_LS: CR7.2(IO2) P4.11 P7.10 R57.2 U10.15(1B1)
XDS_RX: U5.33(PA0/U0RX) U8.8(2A1)
XDS_RX_LS: P4.13 R61.2 U8.13(2B1)
XDS_SWO: U5.25(PC4/C1-) U8.9(2A2)
XDS_SWO_LS: P4.1 R62.2 U8.12(2B2)
XDS_TCK: U5.35(PA2/SSI0CLK) U9.6(1A1)
XDS_TCK_LS: CR7.6(IO5) P4.7 P7.4 U9.15(1B1)
XDS_TDI: U5.38(PA5/SSI0XDAT1) U9.7(1A2)
XDS_TDI_LS: CR7.3(IO3) P4.5 P7.8 U9.14(1B2)
XDS_TDO: U5.37(PA4/SSI0XDAT0) U9.9(2A2)
XDS_TDO_LS: CR7.5(IO4) P4.3 P7.6 R63.2 U9.12(2B2)
XDS_TMS: U5.36(PA3/SSI0FSS) U10.8(2A1)
XDS_TMS_DIR: U5.24(PC5/C1+) U10.5(2DIR)
XDS_TMS_LS: CR7.7(IO6) P4.9 P7.2 R65.2 U10.13(2B1)
XDS_TX: U5.34(PA1/U0TX) U8.6(1A1)
XDS_TX_LS: P4.15 U8.15(1B1)
XDS_VCC: C35.1 C36.1 C37.1 C38.1 C39.1 C40.1 C41.1 C42.1 C47.1 C49.1 C52.1 C54.1 C56.1 P4.17 P8.1(6) P10.1 R17.2 R18.2 R27.1 R30.2 R31.2 R33.2 R39.1 R58.2 U5.7(VDD#7) U5.8(VDDA) U5.16(VDD#16) U5.26(VDD#26) U5.28(VDD#28) U5.39(VDD#39) U5.47(VDD#47) U5.51(VDD#51) U5.52(VDD#52) U5.69(VDD#69) U5.79(VDD#79) U5.90(VDD#90) U5.101(VDD#101) U5.113(VDD#113) U5.122(VDD#122) U7.3(OUT#3) U7.4(OUT#4) U8.3(VCCA) U8.4(1DIR) U9.3(VCCA) U9.4(1DIR) U10.3(VCCA) U10.4(1DIR)
N949215: R17.1 R20.1 R21.1 U5.70(NRST)
N949243: R30.1 U5.60(PK7)
N949263: C47.2 R33.1 R34.2 U7.5(FB)
N949375: R28.2 U5.59(RBIAS)
N949517: R22.1 R24.1 U5.1(PD0/AIN15)
N949687: C34.1 U5.89(OSC1) Y3.3
N949695: C33.1 U5.88(OSC0) Y3.1
N950083: C32.1 C50.1 R18.1 U5.9(VREFA+) U6.3(CATHODE)
N950235: R19.2 U5.95(PB0/USB0ID)
N951001: R39.2 U5.63(PK4)
N951013: R29.1 U5.61(PK6)
N951017: R27.2 U5.62(PK5)
N952443: C46.1 R31.1 U5.68(VBAT)
N1004371: R23.2 U5.3(PD2/AIN13)
N1004534: R25.2 U5.4(PD3/AIN12)
N1013277: U1.46(X24M_N) Y2.3
N1013855: C22.1 L22.2 L23.2 U1.2(RF_N)
N1013859: C11.2 L12.1 L22.1 U1.1(RF_P)
N1013899: C12.1 C22.2 L12.2 L13.1
N1013931: C13.1 L13.2 L14.1
N1013977: A1.1 C58.1 R12.2
N1014101: C17.1 U1.4(X32K_Q1) Y1.1
N1014113: C18.1 U1.5(X32K_Q2) Y1.2
N1018952: U1.47(X24M_P) Y2.1
N1031635: CR6.1 J6.M1(SHIELD1) J6.M2(SHIELD2) R32.2
N1105722: CR1.2(A) R15.1
N1105771: CR2.2(A) R14.1
N1105824: P6.1 R14.2
N1106228: P6.3 R15.2
N1176544: J2.13 R46.1
N1176548: J2.15 R47.1
N1176568: J2.17 R48.1
N1177007: J2.19 R49.1
N1288065: R55.1 SW2.3
N1288098: R56.1 SW1.4
N1384129: R57.1 SW3.3
N1393569: C19.1 U1.23(DCOUPL)
N1403554: C21.1 L23.1 U1.3(RX_TX)
N1414078: C14.1 C15.1 L14.2
N1442334: R59.1 U4.3(NWP/SIO2)
N1442341: R60.1 U4.7(NRST/SIO3)
N1450387: C15.2 C24.1 R12.1 R13.1
N1456638: P11.1 R13.2
N1467198: C59.1 R66.2 U5.96(PB1/USB0VBUS)
N10367920: CR5.2(A) R25.1
N10368080: CR4.2(A) R23.1

Pads without a net: CR7 1; CR8 1; FIDU1 1; FIDU2 1; FIDU3 1; FIDU4 1; FIDU5 1; FIDU6 1; J1 18; J2 8; P5 7; P7 7; P8 7; U5 2 5 6 11 12 13 14 15 18 19 20 21 22 23 27 29 30 31 32 41 42 43 44 45 46 49 50 53 54 56 57 65 67 71 72 73 74 75 76 77 78 81 82 83 84 85 86 91 92 102 103 104 105 106 107 108 109 110 111 112 116 117 118 119 120 121 123 124 125 126 127 128; U6 2 4 5; U7 7; U8 14; U9 8; U10 14

## Via types
v1: diameter 0.4, hole 0.2, TOP to BOTTOM, 494 vias
v2: diameter 0.5, hole 0.201, TOP to BOTTOM, 28 vias

## Routing (per net, layer and track width the routed paths; a pad name or vN(x,y) marks a point on that pad's centre or on a via; arc(x,y) is an arc through that point)
+5V: length 55.4
  L3 w0.5: P4.20 8.92,49.54 J1.2 7.58,45.8 4.7,45.8 0.75,41.85 0.75,17.07 P2.1
GND: length 134
  TOP w0.15: MH5.1 4.1,57.6 ; MH5.1 3,56.5 ; MH5.1 3,58.7 ; MH5.1 1.9,57.6 ; 7.85,41.92 J1.4 8.06,41.06 ; C12.2 v1(22.6,33.9) ; C12.2 22.76,34.4 ; C12.2 22.76,33.4 ; C12.2 23.4,33.9 ; v1(28.3,26.3) C58.2 29,26.3 ; 25.2,34.76 C21.2 ; C21.2 26.2,34.76 ; C21.2 25.2,35.79 ; C21.2 25.7,34.6 v1(25.8,34.5) ; C21.2 26.2,35.79 ; C21.2 25.7,35.4 ; 22.19,36.6 C11.1 ; C11.1 v1(22.1,37.1) ; C11.1 23.21,37.6 ; C11.1 22.9,37.1 ; C11.1 22.19,37.6 ; C11.1 23.21,36.6 ; C14.2 25.1,28.8 ; C14.2 25.6,28.99 ; C14.2 25.6,27.96 ; C14.2 24.6,28.99 ; C14.2 v1(25.1,27.9) ; C14.2 24.6,27.96 ; 10.39,54.62 P4.22 ; P4.22 12.54,54.62 ; P4.22 11.46,53.54 ; P4.22 11.46,55.7 ; P11.M1 36.75,26.75 36.7,26.7 ; P11.M1 37.9,27.4 ; P11.M1 35.6,27.4 ; v1(28.4,60.07) U9.16 27.91,60.6 28,60.69 U9.1 ; 11.46,56.08 P4.21 ; P4.21 10.39,57.16 ; P4.21 12.54,57.16 ; P4.21 11.46,58.24 ; 30.35,29.75 31.07,29.76 ; 30.35,29.75 29.63,29.75 ; 30.35,29.75 30.34,29.03 ; U10.16 v1(24.4,60.07) ; 28.07,35.2 28.07,35.22 v1(27.6,35.7) ; P11.M2 36.75,30.65 36.7,30.7 ; P11.M2 v1(35.3,29) ; P11.M2 37.9,29 ; 29,26.3 28.5,26.8 ; 29,26.3 29,26.9 ; C13.2 25.64,31.8 ; C13.2 25.64,30.8 ; C13.2 25,31.3 ; C13.2 v1(25.8,31.3) ; J2.2 52.12,45.54 ; J2.2 52.12,43.38 ; J2.2 53.2,44.46 ; U8.1 19.91,60.61 U8.16 v1(20.4,60.07) ; 21.8,38.3 22.2,38.3 ; 22.9,38.1 v1(22.9,38.8) ; 26.5,37.5 26.3,37.7 ; 37.1,28.2 P11.2
  TOP w0.5: J6.5 12.7,88.6
  L2 w0.15: P4.22 12.54,54.62 ; P4.22 10.39,54.62 ; P4.22 11.46,53.54 ; P4.22 11.46,55.7 ; J2.2 53.2,44.46 ; J2.2 52.12,45.54 ; J2.2 52.12,43.38 ; J2.2 51.05,44.46 ; 55.8,90.55 MH4.1 53.65,92.7 ; 4.65,92.7 MH3.1 2.5,90.55 ; 10.39,57.16 P4.21 ; P4.21 11.46,58.24 ; P4.21 12.54,57.16 ; P4.21 11.46,56.08 ; 3,56.5 MH5.1 ; MH5.1 1.9,57.6 ; MH5.1 3,58.7 ; MH5.1 4.1,57.6 ; J1.4 10,41.92 ; J1.4 8.92,43 ; J1.4 8.92,40.84 ; J1.4 7.85,41.92
  L2 w0.8: 1.3,26.8 1.3,21.6 P2.3 P2.2 ; 56.8,26.5 56.8,21.2 P1.3 P1.2
  BOTTOM w0.15: 52.12,43.38 J2.2 ; J2.2 52.12,45.54 ; J2.2 53.2,44.46 ; J2.2 51.05,44.46 ; P4.22 12.54,54.62 ; P4.22 11.46,53.54 ; P4.22 11.46,55.7 ; P4.22 10.39,54.62 ; J1.4 8.92,43 ; J1.4 10,41.92 ; J1.4 8.92,40.84 ; J1.4 7.85,41.92 ; MH5.1 3,58.7 ; MH5.1 1.9,57.6 ; MH5.1 4.1,57.6 ; MH5.1 3,56.5 ; 11.46,56.08 P4.21 ; P4.21 10.39,57.16 ; P4.21 12.54,57.16 ; P4.21 11.46,58.24
  vias: v1(1.1,43.9) v1(1.4,71) v1(1.4,45.9) v1(1.6,72.5) v1(1.6,67.6) v1(1.7,41) v1(2.1,87.28) v1(2.1,84.74) v1(2.3,74.4) v1(2.6,53.2) v1(2.7,33.8) v1(3.1,78.6) v1(3.3,42.5) v1(3.37,83.47) v1(3.5,37.7) v1(3.6,61.7) v1(4,81.3) v1(4.4,35.3) v1(4.8,82.3) v1(4.8,47.3) v1(4.8,30.7) v1(4.8,27.6) v1(4.9,51.6) v1(5,26.3) v1(5.1,71.3) v1(5.2,77.7) v1(5.3,86.9) v1(6,87.9) v1(6.4,62) v1(7.5,82.6) v1(8.3,30.5) v1(8.5,88.3) v1(9,65.2) v1(10,84.3) v1(10.1,52.8) v1(10.3,29.6) v1(10.4,33.3) v1(10.7,85.3) v1(10.8,81.2) v1(11.2,17.4) v1(11.2,12.7) v1(11.2,2.7) v1(11.3,62.1) v1(11.3,7.4) v1(11.8,78) v1(11.8,65.2) v1(12,10.9) v1(12.3,81.6) v1(12.3,51.7) v1(12.5,14.3) v1(12.5,5.4) v1(12.5,1.1) v1(12.8,16) v1(13.2,82.8) v1(13.5,88.2) v1(13.6,81.9) v1(13.8,87.3) v1(14,17.4) v1(14.1,58.7) v1(14.3,82.6) v1(14.3,40.5) v1(14.3,26.4) v1(14.4,36.9) v1(14.4,33.8) v1(14.4,30.9) v1(14.5,88.3) v1(15,12.2) v1(15.5,31.8) v1(15.5,7.4) v1(15.7,85.6) v1(15.8,87.4) v1(15.8,39.9) v1(15.8,29.4) v1(15.8,2.4) v1(16,34.5) v1(16.1,37.3) v1(16.2,43) v1(16.3,61.8) v1(16.3,38.6) v1(16.6,47.6) v1(16.6,16) v1(17.1,5.9) v1(17.3,78) v1(17.4,27.4) v1(17.6,81.4) v1(17.7,59) v1(17.7,55.6) v1(17.7,49.8) v1(17.7,10.9) v1(17.8,61.7) v1(17.9,71.3) v1(17.9,17.4) v1(18,75.4) v1(18,74.2) v1(18.12,39.5) v1(18.2,41.2) v1(18.3,42.7) v1(18.4,82.6) v1(18.4,47.6) v1(18.6,42) v1(18.6,37.5) v1(18.8,86.1) v1(19,26.3) v1(19.3,61.5) v1(19.3,61) v1(20,27.4) v1(20,1) v1(20.3,47.5) v1(20.3,43.1) v1(20.4,40.9) v1(20.5,39.4) v1(20.5,16) v1(20.6,38.7) v1(20.6,7.4) v1(20.7,63.9) v1(20.8,84.8) v1(20.8,29.1) v1(20.9,48.31) v1(20.9,43.2) v1(21.2,40.82) v1(21.2,12.3) v1(21.3,71.1) v1(21.4,38.7) v1(21.7,59.5) v1(21.8,87.8) v1(21.8,31.1) v1(21.8,29.5) v1(21.9,35.3) v1(21.9,27.5) v1(22.1,62.5) v1(22.1,60) v1(22.3,69.2) v1(22.33,36.54) v1(22.4,37.7) v1(22.4,26.5) v1(22.6,84.7) v1(22.6,76.7) v1(22.7,74.7) v1(22.7,34.5) v1(22.7,33.3) v1(22.8,48.82) v1(22.8,36.3) v1(22.8,32.7) v1(23,35.5) v1(23.1,61.8) v1(23.1,61.2) v1(23.1,29.9) v1(23.32,48.8) v1(23.3,17.3) v1(23.3,5.9) v1(23.4,32.1) v1(23.4,31.2) v1(23.5,29) v1(23.6,27.7) v1(23.7,52.3) v1(24,11) v1(24.1,2.5) v1(24.4,52.3) v1(24.5,49.2) v1(24.6,28.1) v1(24.9,63.5) v1(25,33.8) v1(25,30.5) v1(25.1,65.9) v1(25.2,32.9) v1(25.2,26.3) v1(25.3,87.8) v1(25.5,83.2) v1(25.6,93.4) v1(25.6,34) v1(25.6,31.8) v1(25.6,30.8) v1(25.7,78.9) v1(25.7,73.9) v1(25.66,28.1) v1(25.7,27.5) v1(26,52.3) v1(26,37.7) v1(26,16) v1(26.1,32.8) v1(26.2,30.5) v1(26.3,34.8) v1(26.37,36.11) v1(26.5,37) v1(26.5,35.6) v1(26.6,48.8) v1(26.6,26.3) v1(26.65,59.42) v1(26.7,34.1) v1(26.9,31.7) v1(26.9,7.5) v1(27.1,36.4) v1(27.2,30.5) v1(27.3,61.74) v1(27.3,61.2) v1(27.3,52.2) v1(27.4,68.2) v1(27.5,28.8) v1(27.7,27.5) v1(27.7,0.9) v1(27.9,34.1) v1(27.9,33) v1(28.4,26.9) v1(28.5,30.5) v1(28.5,17.4) v1(28.8,28.8) v1(28.8,27.9) v1(28.9,35.2) v1(28.9,31.3) v1(28.9,12.4) v1(29,27.1) v1(29.2,20.5) v1(29.3,30.2) v1(29.3,24.2) v1(29.7,60.1) v1(30.3,49.3) v1(30.5,64.1) v1(30.5,24.3) v1(30.5,6) v1(30.6,46.7) v1(30.6,35.1) v1(30.6,22.4) v1(30.6,18.4) v1(30.6,16) v1(30.7,27.1) v1(30.9,59.5) v1(30.9,31.8) v1(31,29.8) v1(31.1,47.57) v1(31.2,29) v1(31.2,26.2) v1(31.7,46.62) v1(31.7,30.5) v1(31.8,63.3) v1(31.8,35.2) v1(32,39.7) v1(32,27.2) v1(32.1,28.9) v1(32.1,26.2) v1(32.3,7.4) v1(32.3,2.5) v1(32.57,40) v1(32.8,34.2) v1(32.9,46.4) v1(33,54.6) v1(33,45.2) v1(33,32.6) v1(33,10.9) v1(33.1,48.4) v1(33.2,29) v1(33.3,58.8) v1(33.5,27.1) v1(33.5,26.5) v1(33.8,30.4) v1(34.1,46.5) v1(34.1,26.2) v1(34.2,94.2) v1(34.4,29) v1(34.4,27.4) v1(34.5,36.4) v1(34.8,5.9) v1(34.9,26.6) v1(35.2,27.5) v1(35.3,31.4) v1(35.6,63.6) v1(35.7,0.9) v1(35.8,51.9) v1(35.8,29.7) v1(35.8,26.6) v1(36,53.8) v1(36.4,7.5) v1(36.5,79.6) v1(37,26.3) v1(37.1,35.6) v1(37.3,29.8) v1(37.9,26.3) v1(38.3,34.6) v1(38.7,5.9) v1(38.8,35.68) v1(38.8,12.4) v1(38.9,27.8) v1(39.2,66.1) v1(39.6,62.3) v1(39.6,2.5) v1(40.04,51.34) v1(40.1,47.5) v1(40.3,43.9) v1(40.4,42.5) v1(40.5,39.8) v1(40.7,35.8) v1(40.7,34.9) v1(40.8,27.4) v1(40.8,26.3) v1(41.1,94) v1(41.6,7.5) v1(41.79,56.42) v1(42.3,47.6) v1(42.6,59.3) v1(42.9,11) v1(43.5,50.4) v1(43.5,37.1) v1(43.6,1) v1(44,39.9) v1(44.2,6) v1(44.3,26.2) v1(44.9,66.5) v1(45.2,31.2) v1(45.3,47.7) v1(45.5,12.5) v1(46,26.2) v1(46.2,61) v1(46.6,49.8) v1(46.6,2.4) v1(46.8,27.7) v1(47,7.5) v1(47.1,45.2) v1(47.1,10.3) v1(47.2,56.1) v1(47.5,33.7) v1(47.6,63.3) v1(47.6,36.2) v1(47.7,57.3) v1(47.9,5.9) v1(48,93.6) v1(48.1,1.1) v1(48.6,12.4) v1(48.6,7.6) v1(49,51.1) v1(50.8,64.7) v1(50.8,26.3) v1(51.5,49.3) v1(52.8,51.8) v1(53.3,50.6) v1(53.7,57) v1(53.8,61) v1(53.9,35) v1(53.9,26.2) v1(54,28.5) v1(54.3,43.1) v1(54.3,40.4) v1(54.9,26.2) v1(55.1,65.5) v1(56.1,55.4) v1(56.9,70.6) v1(56.9,61.3) v1(56.9,44.1) v1(56.9,35.2) v1(56.9,30) v1(56.9,28) v1(57.1,77.2) v1(57.1,39.2) v1(57.2,81.7) v1(57.3,88.2) v1(57.6,45.5) v2(13.2,86) v2(13.2,85.1) v2(13.2,84.2) v2(24.6,45.2) v2(24.6,44.2) v2(24.6,43.2) v2(24.6,42.2) v2(24.6,41.2) v2(25.6,45.2) v2(25.6,44.2) v2(25.6,43.2) v2(25.6,42.2) v2(25.6,41.2) v2(26.6,45.2) v2(26.6,44.2) v2(26.6,43.2) v2(26.6,42.2) v2(26.6,41.2) v2(27.6,45.2) v2(27.6,44.2) v2(27.6,43.2) v2(27.6,42.2) v2(27.6,41.2) v2(28.6,45.2) v2(28.6,44.2) v2(28.6,43.2) v2(28.6,42.2) v2(28.6,41.2)
VDDC: length 16.2
  TOP w0.2: U5.87 8.9,72.2 7.3,70.6 U5.115 2.5,70.6 C43.1 C44.1 C45.1
VDDR: length 25.8
  TOP w0.3: U1.45 22.1,41.9 C16.1 21.6,41.5 21.07,42.03 20.06,42.03 19.76,42.33 v1(19.76,42.47) ; U1.48 23.2,39.95 22.65,39.4 22.14,39.4
  TOP w0.4: 22.14,39.4 C9.1 v1(22.1,38.8)
  TOP w0.5: v1(24,49.7) 24.3,50 25.3,50 L1.2 C8.1
  L3 w0.4: v1(19.76,42.47) 19.76,40.64 20.45,39.95 21.48,39.95 22.1,39.33 v1(22.1,38.8)
  L3 w0.5: v1(24,49.7) 20.9,49.7 19.69,48.49 19.69,42.47 v1(19.76,42.47)
VDDS: length 37.4
  TOP w0.3: R1.2 22.18,48 C6.1 C7.1 24.3,48 24.9,47.4 U1.34 ; C4.1 v1(31.9,45.2) 31.42,45.2 31.12,44.9 U1.22 ; U1.44 22.35,42.4 22.15,42.6 C5.1 ; U1.13 C3.1
  TOP w0.5: v1(21.6,48.4) 21.9,48.4 ; 21.9,48.4 21.9,50.09 22.61,50.8 FL1.1 ; 21.9,48.4 21.9,48.4 R1.2 21.9,47.6 ; v1(21.6,43.2) C5.1 ; C3.1 v1(31.2,39.8)
  L3 w0.5: v1(21.6,48.4) v1(21.6,43.2) 21.6,42 23.8,39.8 v1(31.2,39.8) 31.2,43.42 31.9,44.12 v1(31.9,45.2)
BP_RESET: length 17.7
  TOP w0.15: v1(47.8,40.9) 43.7,45 R52.2
  L3 w0.15: v1(47.8,40.9) 47.8,39.4 49.1,38.1 49.9,38.1 50.63,37.37 50.63,32.81 J2.11
CC1310_RESET: length 73.5
  TOP w0.15: v1(38.7,49.7) 38.6,49.8 CR8.2 ; U1.35 24.4,47.02 24.14,47.28 23.57,47.28 23.1,46.8 R1.1 C20.1 15.6,46.8 15.1,47.3 15.1,52.15 15.92,52.97 22.51,52.97 P4.12 ; v1(40.8,47.5) R51.2 R52.1 45.1,46.6 51.3,52.8 51.3,54.71 50.34,55.67 48.87,55.67 48.59,55.39 46.9,53.7 P5.10
  L3 w0.15: v1(40.8,47.5) 40.51,47.78 40.51,47.88 v1(38.7,49.7)
  BOTTOM w0.15: v1(40.8,47.5) 40.8,51.4 39.22,52.97 25.81,52.97 P4.12
CC1310_RXD: length 78.6
  TOP w0.15: 14.2,47.77 14.5,48.07 14.5,52.4 15.67,53.57 15.92,53.57 15.92,53.57 18.03,53.57 P4.16 ; 14.2,47.77 14.27,47.69 v1(14.27,47.4) ; 14.2,47.77 7.37,47.77 5,45.4 5,38.22 J1.7 ; U1.7 26.9,38.93 28.15,37.68 35.13,37.68 38.12,40.67 38.12,47.05 34.5,50.67 v1(34.5,51.8)
  L3 w0.15: v1(34.5,51.8) 33.57,50.88 17.5,50.88 14.56,47.93 14.56,47.69 v1(14.27,47.4)
CC1310_SWO: length 71
  TOP w0.15: J2.9 50.8,35.52 50.8,47.13 50.63,47.3 v1(50.63,47.7) 50.63,51.71 51.6,52.67 51.6,54.83 50.46,55.97 49.03,55.97 48.36,56.64 45.64,56.64 45,56 v1(44.6,56) ; U1.28 v1(27.9,48.4) 27.9,53.17 27.89,53.18 v1(27.89,55.69)
  L3 w0.15: v1(50.63,47.7) 47.2,47.7 46.5,47 33.47,47 32.8,47.68 32.8,47.68 32.37,48.1 30.9,48.1 30.3,47.5 28.8,47.5 v1(27.9,48.4) ; P4.2 38.72,54.62 40.1,56 41.6,56 41.62,55.97 41.98,55.97 42,56 v1(44.6,56)
CC1310_TCK: length 60.3
  TOP w0.15: CR8.6 38.6,52.5 38.9,52.8 39.4,52.8 39.8,52.4 41.42,52.4 41.97,52.95 P5.4 41.97,54.45 41.42,55 39.8,55 v1(36.7,51.9) 36.7,49.87 38.14,48.43 38.8,48.43 39.33,47.9 39.33,47.48 39.32,47.47 39.32,40.17 36.1,36.95 36.1,33.27 37.5,31.88 38.4,31.88 40.9,29.38 40.9,28.71 41.7,27.91 R47.2 ; P4.8 29.24,53.59 29.4,53.44 U1.25
  L3 w0.15: P4.8 30.27,54.62 31.69,53.2 35.4,53.2 v1(36.7,51.9)
CC1310_TMS: length 54.8
  TOP w0.15: v1(26.7,49.5) 26.7,53.59 26.7,53.59 P4.10 ; R46.2 41.7,29.22 41.08,29.84 40.86,29.84 38.53,32.18 37.62,32.18 36.4,33.4 36.4,36.82 39.62,40.05 39.62,47.35 39.63,47.35 39.63,47.78 39.63,47.78 39.63,48.03 38.93,48.72 38.27,48.72 37,49.99 37,51.3 v1(37.6,51.9) CR8.7 38.1,52.5 39.3,53.7 P5.2 ; U1.24 v1(30.1,48)
  L3 w0.15: 30.6,48.5 28.8,48.5 27.8,49.5 v1(26.7,49.5) ; 30.6,48.5 v1(30.1,48) ; 30.6,48.5 32.4,48.5 32.68,48.22 33.4,47.5 34.1,47.5 34.38,47.77 34.38,48.18 37.6,51.4 v1(37.6,51.9)
CC1310_TXD: length 68.7
  TOP w0.15: P4.14 20.27,53.27 15.79,53.27 14.8,52.28 14.8,47.2 14.5,46.9 7,46.9 5.33,45.23 5.33,40.43 J1.5 ; U1.8 27.4,38.85 28.28,37.97 35,37.97 37.82,40.8 37.82,46.92 34.2,50.55 34.2,51.3 32,53.5 v1(30.1,53.5)
  L3 w0.15: v1(30.1,53.5) 29.7,53.5 29.6,53.4 29.28,53.4 29.12,53.25 29.12,53.22 28.88,52.97 28.52,52.97 28.28,53.22 28.28,53.25 28.12,53.4 22.84,53.4 P4.14
CC1310_VDD: length 169.1
  TOP w0.3: C30.1 v1(37.2,36.4) ; C30.1 U4.8 ; C30.1 37.8,37.12 R60.2 ; R3.2 13.6,29 12.88,29.72 12.88,41.18 v1(14.7,43) ; R3.2 13.58,28.2 12.52,28.2 R2.2 ; R3.2 13.6,28.1 ; P5.1 38.43,49.1 37.6,49.93 v1(37.6,50.6) ; v1(15.6,51.8) v1(15.6,48.1) ; R59.2 40.62,32.98 v1(41,32.6) ; R11.2 38.28,32.6 v1(38.3,32.6)
  TOP w0.4: P5.1 40.7,49.85 41.85,51 46.28,51 P10.3 ; FL1.2 v1(21.8,52.2) 21.27,52.2 20.97,52.5 16.3,52.5 v1(15.6,51.8) ; v1(37.6,50.6) 37.6,50.94 37.81,51.15 CR8.8
  L3 w0.3: 41.01,32.6 48.31,25.3 57.75,25.3 ; 41.01,32.6 v1(41,32.6) v1(38.3,32.6) ; 41.01,32.6 37.55,36.06 37.54,36.06 v1(37.2,36.4) ; v1(15.6,48.1) 15.6,43.9 v1(14.7,43)
  L3 w0.4: P4.18 16.54,53.37 15.6,52.43 v1(15.6,51.8)
  L3 w0.5: P10.3 49.9,50 57.75,42.15 57.75,17.07 P1.1 ; J1.1 7.64,43.2 10.3,43.2 11.3,44.2 11.3,49.38 P4.18
  BOTTOM w0.4: v1(21.8,52.2) 23.03,50.97 37.23,50.97 v1(37.6,50.6)
DCDC_SW: length 1.9
  TOP w0.3: L1.1 25.4,47.61 U1.33
DIO1: length 79.5
  TOP w0.15: v1(13.6,42.8) 12.5,41.7 12.5,29.2 v1(13,28.7) ; v1(34.4,52.4) 34.8,52.4 34.93,52.28 34.93,50.67 38.43,47.17 38.43,40.55 35.25,37.38 28.03,37.38 26.4,39 U1.6
  L3 w0.15: v1(34.4,52.4) 33.18,51.18 17.38,51.18 13.6,47.4 v1(13.6,42.8) ; v1(13,28.7) 13,25.68 J1.20
DIO4_SCL: length 74.5
  TOP w0.15: 11.9,27.3 R2.1 ; 11.9,27.3 11.6,27.3 9.8,25.5 7.74,25.5 J1.17 ; 11.9,27.3 11.9,28.4 12.2,28.7 12.2,42 v1(12.95,42.75) ; U1.9 27.9,38.78 28.4,38.28 34.88,38.28 37.53,40.92 37.53,46.8 32.38,51.94 32.38,52.01 v1(32.1,52.3)
  L3 w0.15: v1(32.1,52.3) 31.28,51.47 17.25,51.47 13.3,47.52 13.3,47.28 13.3,43.1 v1(12.95,42.75)
DIO5_SDA: length 81.3
  TOP w0.15: v1(31.2,52.3) 32.68,50.82 33.07,50.82 37.22,46.67 37.22,41.05 34.75,38.57 28.72,38.57 28.4,38.9 U1.10 ; R3.1 13.6,26.7 13.2,26.3 v1(12.4,26.3)
  L3 w0.15: v1(12.4,26.3) 12.4,25.9 12,25.5 7.8,25.5 ; 7.8,25.5 7.8,23.02 J1.19 ; 7.8,25.5 7.8,39.8 8.5,40.5 9.41,40.5 13,44.09 13,47.65 17.13,51.78 30.68,51.78 v1(31.2,52.3)
DIO6_RLED: length 62.3
  TOP w0.15: v1(32.9,50.1) 33.3,50.1 36.8,46.6 v1(36.8,41.4) 36.8,41.05 34.63,38.88 29.07,38.88 28.9,39.05 U1.11
  L3 w0.15: v1(32.9,50.1) 32.43,50.57 19.97,50.57 17.4,48 P6.2 ; v1(36.8,41.4) 37.32,41.92 J2.3
DIO7_GLED: length 59.9
  TOP w0.15: v1(32.1,49.9) 32.5,49.5 33.48,49.5 36.3,46.68 v1(36.3,43.2) 36.3,40.97 34.5,39.18 30.28,39.18 29.75,39.7 U1.12
  L3 w0.15: v1(36.3,43.2) 37.56,44.46 J2.1 ; v1(32.1,49.9) 31.72,50.28 20.5,50.28 19.2,48.97 19.2,37.61 19.94,36.87 P6.4
DIO8_MISO: length 30.6
  TOP w0.15: v1(33,39.6) 33,40.3 32.4,40.9 U1.14 ; J2.14 50.94,30.4 40.8,30.4 38.97,32.23 v1(38.97,33.2) 38.97,33.37 39.1,33.5 U4.2
  L3 w0.15: v1(38.97,33.2) 36.2,33.2 33,36.4 v1(33,39.6)
DIO9_MOSI: length 28.2
  TOP w0.15: v1(40.8,38.3) 40.8,37.6 40.1,36.9 U4.5 ; v1(46,34.4) 47.59,32.81 51.07,32.81 J2.12 ; U1.15 32.6,41.4 v1(33.8,40.2)
  L3 w0.15: v1(46,34.4) 44.7,34.4 v1(40.8,38.3) 38.9,40.2 v1(33.8,40.2)
DIO10_SCLK: length 72
  TOP w0.15: v1(34.4,39.7) 34.4,40.1 34.6,40.3 ; 34.6,40.3 34.4,40.3 32.8,41.9 U1.16 ; 34.6,40.3 34.9,40.3 35.8,41.2 35.8,46.75 33.35,49.2 31.9,49.2 30.49,50.62 30.49,52.14 v1(30.2,52.43) ; U4.6 39.6,37.1 v1(40.3,37.8)
  L3 w0.15: v1(34.4,39.7) 38.4,39.7 v1(40.3,37.8) ; v1(30.2,52.43) 29.85,52.78 29.8,52.78 29.77,52.8 29.55,52.8 29.13,52.38 28.27,52.38 27.85,52.8 17.73,52.8 12.7,47.77 12.7,44.21 9.29,40.8 8.3,40.8 7.5,40 7.5,30.34 J1.13
DIO11_CS: length 24.9
  TOP w0.15: U1.17 v1(35,42.4)
  L3 w0.15: J2.6 50.8,40.7 50.8,42.5 50.2,43.1 37.7,43.1 37,42.4 v1(35,42.4)
DIO12: length 23
  TOP w0.15: U1.18 v1(34.1,42.9)
  L3 w0.15: J2.4 50.63,43.41 37.51,43.41 36.8,42.7 35.5,42.7 35.3,42.9 v1(34.1,42.9)
DIO13_BTN1: length 85.7
  TOP w0.15: v1(33.95,47.95) 35.4,46.5 35.4,44.2 v1(34.6,43.4) U1.19 ; v1(12.7,48.7) R56.2 5.9,48.7
  L3 w0.15: J2.16 53.47,28.03 53.47,44.62 52.5,45.6 47.3,45.6 47.28,45.62 46.92,45.62 46.9,45.6 36.8,45.6 v1(34.6,43.4) ; v1(33.95,47.95) 33.95,49.85 35.4,51.3 35.4,51.7 35.38,51.72 35.38,52.08 35.4,52.1 35.4,52.38 34.88,52.9 31.57,52.9 31.37,53.1 30.3,53.1 30.28,53.07 29.92,53.07 29.9,53.1 29.43,53.1 29,52.68 28.4,52.68 27.97,53.1 17.6,53.1 13.2,48.7 v1(12.7,48.7)
DIO14_BTN2: length 52.3
  TOP w0.15: 55.5,45.9 55.5,24.9 54.74,24.14 J2.18 ; 55.5,45.9 55.62,46.02 R55.2 ; 55.5,45.9 54.1,45.9 53.3,46.7 v1(51.3,46.7) ; v1(34.6,44.3) 34.2,43.9 U1.20
  L3 w0.15: v1(51.3,46.7) 47.9,46.7 47.2,46 36.3,46 v1(34.6,44.3)
DIO15: length 52.5
  TOP w0.15: v1(34.6,45.5) 33.5,44.4 U1.21 ; v1(56.1,42.3) 56.1,24.1 53.6,21.6 J2.20
  L3 w0.15: v1(56.1,42.3) 55.81,42.59 55.81,42.79 51.48,47.12 51.4,47.2 47.5,47.2 46.8,46.5 35.6,46.5 v1(34.6,45.5)
DIO16_TDO: length 67.6
  TOP w0.15: v1(28.7,53.4) 28.9,53.2 U1.26 ; R48.2 41.7,24.12 40.3,25.53 40.3,29.55 38.28,31.57 37.37,31.57 35.8,33.15 35.8,37.07 39.03,40.3 39.03,47.78 38.68,48.12 38.02,48.12 36.24,49.9 36.24,52.7 ; CR8.5 42.67,51.9 43.24,52.47 P5.6 43.24,54.45 42.39,55.3 39.5,55.3 36.9,52.7 36.24,52.7 ; 36.24,52.7 P4.4
  L3 w0.15: v1(28.7,53.4) 28.19,53.91 28.19,55.19 28.67,55.67 33.27,55.67 P4.4
DIO17_TDI: length 71.6
  TOP w0.15: v1(38.6,55.2) 39,55.6 44.1,55.6 44.51,55.19 P5.8 44.51,52.95 43.16,51.6 40.9,51.6 v1(39.7,50.4) CR8.3 ; U1.27 28.4,53.1 28.19,53.31 28.19,55.19 28.7,55.7 30.7,55.7 P4.6 ; v1(38.5,47.7) 38.72,47.47 38.72,40.42 35.5,37.2 35.5,32.9 37.12,31.28 38.15,31.28 40,29.43 40,24 41.7,22.3 R49.2
  L3 w0.15: v1(39.7,50.4) 38.7,50.4 38.22,49.91 38.22,47.99 v1(38.5,47.7) ; v1(38.6,55.2) 38,55.8 35.97,55.8 35.37,55.2 35.37,54.19 34.76,53.57 32.83,53.57 P4.6
DIO19_CTS: length 31.7
  TOP w0.15: U1.29 v1(27.4,48.7)
  L3 w0.15: v1(27.4,48.7) 27.4,48.1 28.38,47.12 32.88,47.12 33.6,46.4 33.6,42.8 35.6,40.8 45.62,40.8 J2.7
DIO20_FLASH_CS: length 37.2
  TOP w0.15: v1(37.1,34.4) 37.4,34.4 R11.1 U4.1 38.6,34.19 38.86,34.45 43.62,34.45 48.56,39.38 J2.5 ; U1.30 v1(26.9,48.1)
  L3 w0.15: v1(37.1,34.4) 35.6,34.4 34,36 34,39.4 32.5,40.9 32.5,45.8 32.1,46.2 28.8,46.2 v1(26.9,48.1)
DIO21: length 38.2
  TOP w0.15: U1.31 v1(26.4,47.38)
  BOTTOM w0.15: J1.15 7.7,28 9.8,28 11,29.2 11,44.3 13.2,46.5 25.52,46.5 v1(26.4,47.38)
DIO22: length 30.8
  TOP w0.15: v1(25.91,47.56) 25.91,47.41 25.9,47.4 U1.32
  BOTTOM w0.15: J1.9 7.78,35.7 10.2,35.7 10.7,36.2 10.7,44.43 13.07,46.8 25.14,46.8 v1(25.91,47.56)
DIO23_ANALOG: length 19.5
  TOP w0.15: J1.3 7.76,43.3 9.77,43.3 12.77,46.3 23.2,46.3 23.5,46.6 U1.36
DIO24_ANALOG: length 27.7
  TOP w0.15: U1.37 12.85,45.9 10.35,43.4 10.3,43.4 10,43.1 10,41.2 9.34,40.54 8.44,40.54 7.8,39.9 7.8,33.18 J1.11
DIO25_ANALOG: length 18
  TOP w0.15: J1.6 10.4,40.86 10.4,42.78 10.4,43.02 12.78,45.4 U1.38
DIO26_ANALOG: length 20.7
  TOP w0.15: J1.8 9.95,36.84 10.7,37.59 10.7,42.9 12.7,44.9 U1.39
DIO27_ANALOG: length 23.2
  TOP w0.15: J1.10 10.3,34.3 11,35 11,42.78 12.82,44.6 22.27,44.6 22.47,44.4 U1.40
DIO28_ANALOG: length 25.2
  TOP w0.15: U1.41 22.55,43.9 22.15,44.3 12.95,44.3 11.3,42.65 11.3,33.11 9.95,31.76 J1.12
DIO29_ANALOG: length 26.9
  TOP w0.15: U1.42 22.55,43.4 21.95,44 13.07,44 11.6,42.53 11.6,31.9 J1.14
DIO30_ANALOG: length 29.2
  TOP w0.15: J1.16 11.9,29.66 11.9,42.4 13.2,43.7 21.82,43.7 22.4,43.12 22.4,43.05 22.55,42.9 U1.43
IRSTN: length 16.5
  TOP w0.15: v1(6.82,85.5) 9.5,85.5 11.2,83.8 11.2,81.5 11.8,80.9 R20.2 14.4,80.9 ; v1(3.5,82.1) 5.3,83.9 v1(5.3,85.5)
  L3 w0.15: v1(5.3,85.5) v1(6.82,85.5)
ITCK: length 12.2
  TOP w0.15: v1(2.1,86) 0.8,84.7 0.8,77.8 2,76.6 U5.100
ITDI: length 10.1
  TOP w0.15: v1(3.38,84.7) 2.8,84.12 2.8,82.5 1.44,81.14 1.44,78.01 2.05,77.4 U5.98
ITDO: length 13.2
  TOP w0.15: U5.97 2.08,77.8 1.74,78.14 1.74,81.01 4.8,84.08 4.8,85.9 v1(3.4,87.3)
ITMS: length 9
  TOP w0.15: 3.8,77 2.03,77 1.14,77.89 1.14,82.54 v1(2.1,83.5)
LP_RESET: length 24.8
  TOP w0.15: R51.1 41.71,45 46.6,40.1 v1(46.6,38.1)
  L3 w0.15: J2.10 52.12,33.27 50.9,32.05 50.9,31.3 50.2,30.6 47.7,30.6 46.6,31.7 v1(46.6,38.1)
USB_DM: length 14.1
  TOP w0.15: v1(8.7,86.9) 7.3,86.9 6.4,86 6.4,80.1 6.5,80 U5.93 ; J6.2 v1(10.75,88.9) 10.8,88.85 CR6.5
  L3 w0.15: v1(8.7,86.9) 8.99,87.19 9.06,87.19 10.75,88.88 v1(10.75,88.9)
USB_DP: length 15.5
  TOP w0.15: U5.94 6.1,86.12 7.36,87.38 8.91,87.38 v1(9.4,86.9) ; 11.3,88.19 11.3,88.8 v1(11.4,88.9) J6.3
  L3 w0.15: v1(9.4,86.9) v1(11.4,88.9)
USB_ID: length 14.1
  TOP w0.15: R19.1 5.6,82.68 5.8,82.88 5.8,86.25 7.25,87.7 9.4,87.7 10.1,87 v1(10.8,87) CR6.2 ; J6.4 v1(12.05,88.9)
  L3 w0.15: v1(12.05,88.9) 10.8,87.65 v1(10.8,87)
USB_VBUS: length 56
  TOP w0.15: R66.1 3.69,80.3 3.29,79.91 3.21,79.91 v1(2.6,79.3) ; v1(4.6,63.1) 4.38,62.87 R22.2 ; U7.8 v1(14.7,86.58)
  TOP w0.3: J6.1 v1(10.1,88.9) 10.1,88.87 10.3,88.67 CR6.6 ; U7.2 U7.1 11.7,86.58 12.2,87.08 C48.1
  TOP w0.5: v1(12.2,87.9) C48.1
  L3 w0.5: 0.75,79.4 0.75,84.24 1.85,85.34 3.94,85.34 4.7,86.1 11.22,86.1 ; 0.75,79.4 0.85,79.3 v1(2.6,79.3) ; 0.75,79.4 0.75,65.95 3.6,63.1 v1(4.6,63.1) 4.6,62.3 7.6,59.3 11.86,59.3 P4.19
V-SENSE: length 40.7
  TOP w0.15: v1(25.7,61.1) C55.1 U10.2 ; v1(29.9,61.1) C57.1 U9.2 ; U8.2 C53.1 v1(21.7,61.1)
  TOP w0.3: v1(29.9,61.1) 36.7,61.1 37.6,62 38.45,62 38.55,61.9 ; 38.55,61.9 CR7.8 ; 38.55,61.9 38.55,62.85 39.8,64.1 44.94,64.1 45.76,63.28 P7.1 46.47,62.53 48.3,60.7 48.3,58.76 P10.2
  L3 w0.3: v1(29.9,61.1) 29.2,61.1 28.8,60.7 26.1,60.7 v1(25.7,61.1) 25.3,60.7 22.1,60.7 v1(21.7,61.1)
XDS_RESET: length 11.5
  TOP w0.15: v1(23.51,63.7) U10.6 23.51,61.99 23.53,61.98 23.53,60.96 23.78,60.7 U10.1 ; U5.40 R58.1 21.3,68.19 21.8,67.69 21.8,66.7 v1(22.8,65.7)
  L3 w0.15: v1(23.51,63.7) 23.79,63.99 23.79,65.4 23.5,65.7 v1(22.8,65.7)
XDS_RESET_LS: length 62.5
  TOP w0.15: U10.15 23.51,59.49 v1(24,59) 24,58.6 24.16,58.44 P4.11 ; 37.32,60.6 v1(34.6,60.6) ; 37.32,60.6 37.1,60.38 37.1,59.7 38.87,57.93 40.68,57.93 ; 37.32,60.6 CR7.2 ; 17.6,90.3 R57.2 v1(17,90.3)
  L3 w0.15: v1(24,59) 26.47,59 26.47,59 26.83,59 27.03,59.2 29.7,59.2 31.1,60.6 ; 31.1,60.6 31.1,61.7 23.74,69.06 23.74,89.34 22.78,90.3 v1(17,90.3) ; 31.1,60.6 v1(34.6,60.6)
XDS_RX: length 3.1
  TOP w0.15: U5.33 19.2,63.33 18.71,62.84 U8.8
XDS_RX_LS: length 10.6
  TOP w0.15: R61.2 21.72,58.29 21.62,58.19 P4.13 21.6,57.16 21.6,56.3 21.2,55.9 18.5,55.9 17.9,56.5 17.9,57.9 18.71,58.71 U8.13
XDS_SWO: length 7.2
  TOP w0.15: U8.9 18.5,61.9 18.1,62.3 18.1,64.75 17.95,64.9 15.05,64.9 14.9,64.75 U5.25
XDS_SWO_LS: length 24.7
  TOP w0.15: 35.5,59.2 35.5,59.95 35.35,60.1 v1(32.5,60.1) ; 35.5,59.2 35.5,58.52 P4.1 ; 35.5,59.2 R62.2 34.8,59.2 ; U8.12 v1(17.8,60.7)
  L3 w0.15: v1(17.8,60.7) 17.8,59.7 19,58.5 26.8,58.5 27.11,58.81 31.21,58.81 v1(32.5,60.1)
XDS_TCK: length 10.4
  TOP w0.15: U9.6 27.51,63.09 25.78,64.81 23.69,64.81 v1(23.3,65.2) ; v1(20.7,65.2) 20.7,65.65 20.15,66.2 U5.35
  L3 w0.15: v1(23.3,65.2) v1(20.7,65.2)
XDS_TCK_LS: length 28.7
  TOP w0.15: P4.7 28.52,57.89 28.52,58.54 27.51,59.55 U9.15 ; CR7.6 43.9,60.6 44.49,60.01 P7.4 44.49,56.69 43.8,56 41.97,56 41.97,56 41.61,56 41.61,56 38.8,56 v1(38.4,56.4)
  L3 w0.15: v1(38.4,56.4) 38.1,56.1 30.3,56.1 P4.7
XDS_TDI: length 10.2
  TOP w0.15: U5.38 20.4,67.4 23.3,64.5 25.66,64.5 27.11,63.05 U9.7
XDS_TDI_LS: length 26.3
  TOP w0.15: U9.14 27.11,59.39 28.19,58.31 28.19,56.73 28.81,56.11 31.76,56.11 31.78,56.13 ; CR7.3 37.8,59.62 38.53,58.9 40.08,58.9 40.44,59.26 41.37,59.26 41.95,58.68 P7.8 41.95,57.18 41.37,56.6 38.9,56.6 38.68,56.82 38.03,56.82 37.33,56.13 37.32,56.13 37.3,56.11 31.81,56.11 31.78,56.13 ; 31.78,56.13 P4.5
XDS_TDO: length 10.1
  TOP w0.15: U9.9 26.3,62.1 26.3,63.3 25.4,64.2 23.1,64.2 20.3,67 19.2,67
XDS_TDO_LS: length 25.4
  TOP w0.15: R63.2 43.22,57.93 P7.6 43.22,59.58 42.7,60.1 v1(40.1,60.1) CR7.5 ; v1(27.77,58.08) 26.85,59 26.4,59 26.03,59.37 26.03,60.46 26.27,60.7 U9.12
  L3 w0.15: v1(40.1,60.1) 40.1,59.7 38.8,58.4 35.56,58.4 P4.3 33.27,58.21 28.29,58.21 28.17,58.08 v1(27.77,58.08)
XDS_TMS: length 6.1
  TOP w0.15: U5.36 20.2,66.6 22.71,64.09 U10.8
XDS_TMS_DIR: length 12.8
  TOP w0.15: U5.24 14.5,64.85 14.85,65.2 18.07,65.2 18.6,64.68 v1(18.6,63.5) ; U10.5 23.91,63.11 v1(24,63.2)
  L3 w0.15: v1(24,63.2) 18.9,63.2 v1(18.6,63.5)
XDS_TMS_LS: length 33.4
  TOP w0.15: U10.13 22.71,57.13 23.73,56.11 25.65,56.11 P4.9 ; CR7.7 v1(40.1,61.1) 44.8,61.1 45.76,60.14 P7.2 46.24,57.93 46.36,58.06 R65.2
  L3 w0.15: v1(40.1,61.1) 36.1,61.1 35.18,60.18 33.28,60.18 31.61,58.51 27.41,58.51 26.7,57.8 P4.9
XDS_TX: length 4.5
  TOP w0.15: U8.6 19.51,64.51 20.2,65.2 20.2,65.65 20.05,65.8 U5.34
XDS_TX_LS: length 3.1
  TOP w0.15: U8.15 19.51,58.62 19.08,58.19 P4.15
XDS_VCC: length 87.6
  TOP w0.15: R58.2 21.13,67.28 v1(20.7,67.7) ; U8.3 U8.4 C52.1 v1(21.7,61.9) ; v1(16.6,85.5) C47.1 17.05,84.9 17.08,84.92 R33.2 ; U10.3 U10.4 C54.1 v1(25.7,61.9) ; U9.3 U9.4 C56.1 ; 21.9,75.7 R30.2 v1(22.61,75.7) ; C42.1 8.8,61.6 8.9,61.7 R18.2 v1(8.9,61.1) ; v1(17.1,82.65) 17.12,82.62 R17.2 ; C37.1 2.4,76.2
  TOP w0.2: U5.69 16.1,80.35 16.2,80.45 C38.1 16.21,80.9 16.7,81.39 16.7,81.49 17.11,81.9 R17.2 ; U5.16 11.3,63 v1(11.5,62.8) ; v1(20.71,80.9) R31.2 20,80.9 ; U5.26 15.3,62.7 15.5,62.5 ; v1(1.75,76) C37.1 ; U5.52 U5.51 C39.1 C40.1 v1(22.3,72.6) ; C42.1 C41.1 8.1,62.7 U5.8 U5.7 ; U5.28 16.1,62.92 15.68,62.5 15.5,62.5 ; U5.90 7.7,80.3 v1(7.6,80.4) ; U5.122 v1(2.74,67.8) ; 2.4,76.2 U5.101 ; v1(21.9,79) R39.1 R27.1 ; U5.39 20.6,67.8 v1(20.7,67.7) ; v1(15.5,61.6) C35.1 15.5,62.5 ; U5.79 v1(12.1,80.36) ; 19.2,71 v1(20.26,71) ; U5.113 2.4,71.4 C36.1 v1(1.65,71.5)
  TOP w0.3: C56.1 v1(29.9,61.9) 36.8,61.9 39.5,64.6 48.8,64.6 49.9,63.5 P10.1 ; v1(15.5,61.6) 15.5,58.2 P4.17 ; v1(11.7,82.3) C49.1 U7.4 U7.3
  L3 w0.15: v1(16.6,85.5) 16.6,83.1
  L3 w0.3: 17.6,63.4 17.69,63.4 19.09,62 21.12,62 21.22,61.9 v1(21.7,61.9) 22.18,61.9 22.28,62 22.31,62 22.71,62.4 25.2,62.4 v1(25.7,61.9) 26.04,62.24 29.56,62.24 v1(29.9,61.9)
  L3 w0.5: 15.2,61.2 15.23,61.2
  vias: v1(2,82.4)
N949215: length 3.8
  TOP w0.15: U5.70 15.7,80.4 R20.1 R21.1 R17.1
N949243: length 2.1
  TOP w0.15: R30.1 21.09,75.7 20.59,76.2 U5.60
N949263: length 3
  TOP w0.15: U7.5 15.53,84.15 R34.2 C47.2 17.05,83.98 17.08,84 R33.1
N949375: length 2.2
  TOP w0.15: R28.2 20.96,74.8 19.96,75.8 U5.59
N949517: length 2.3
  TOP w0.15: U5.1 R22.1 R24.1
N949687: length 6.3
  TOP w0.15: 7.9,84.9 7.9,84.5 7.3,83.9 Y3.3 7.3,83.6 8.18,82.72 8.18,80.33 8.1,80.25 U5.89
  TOP w0.2: C34.1 7.9,84.9
